# Allegro board 200-128343-0000_01.brd
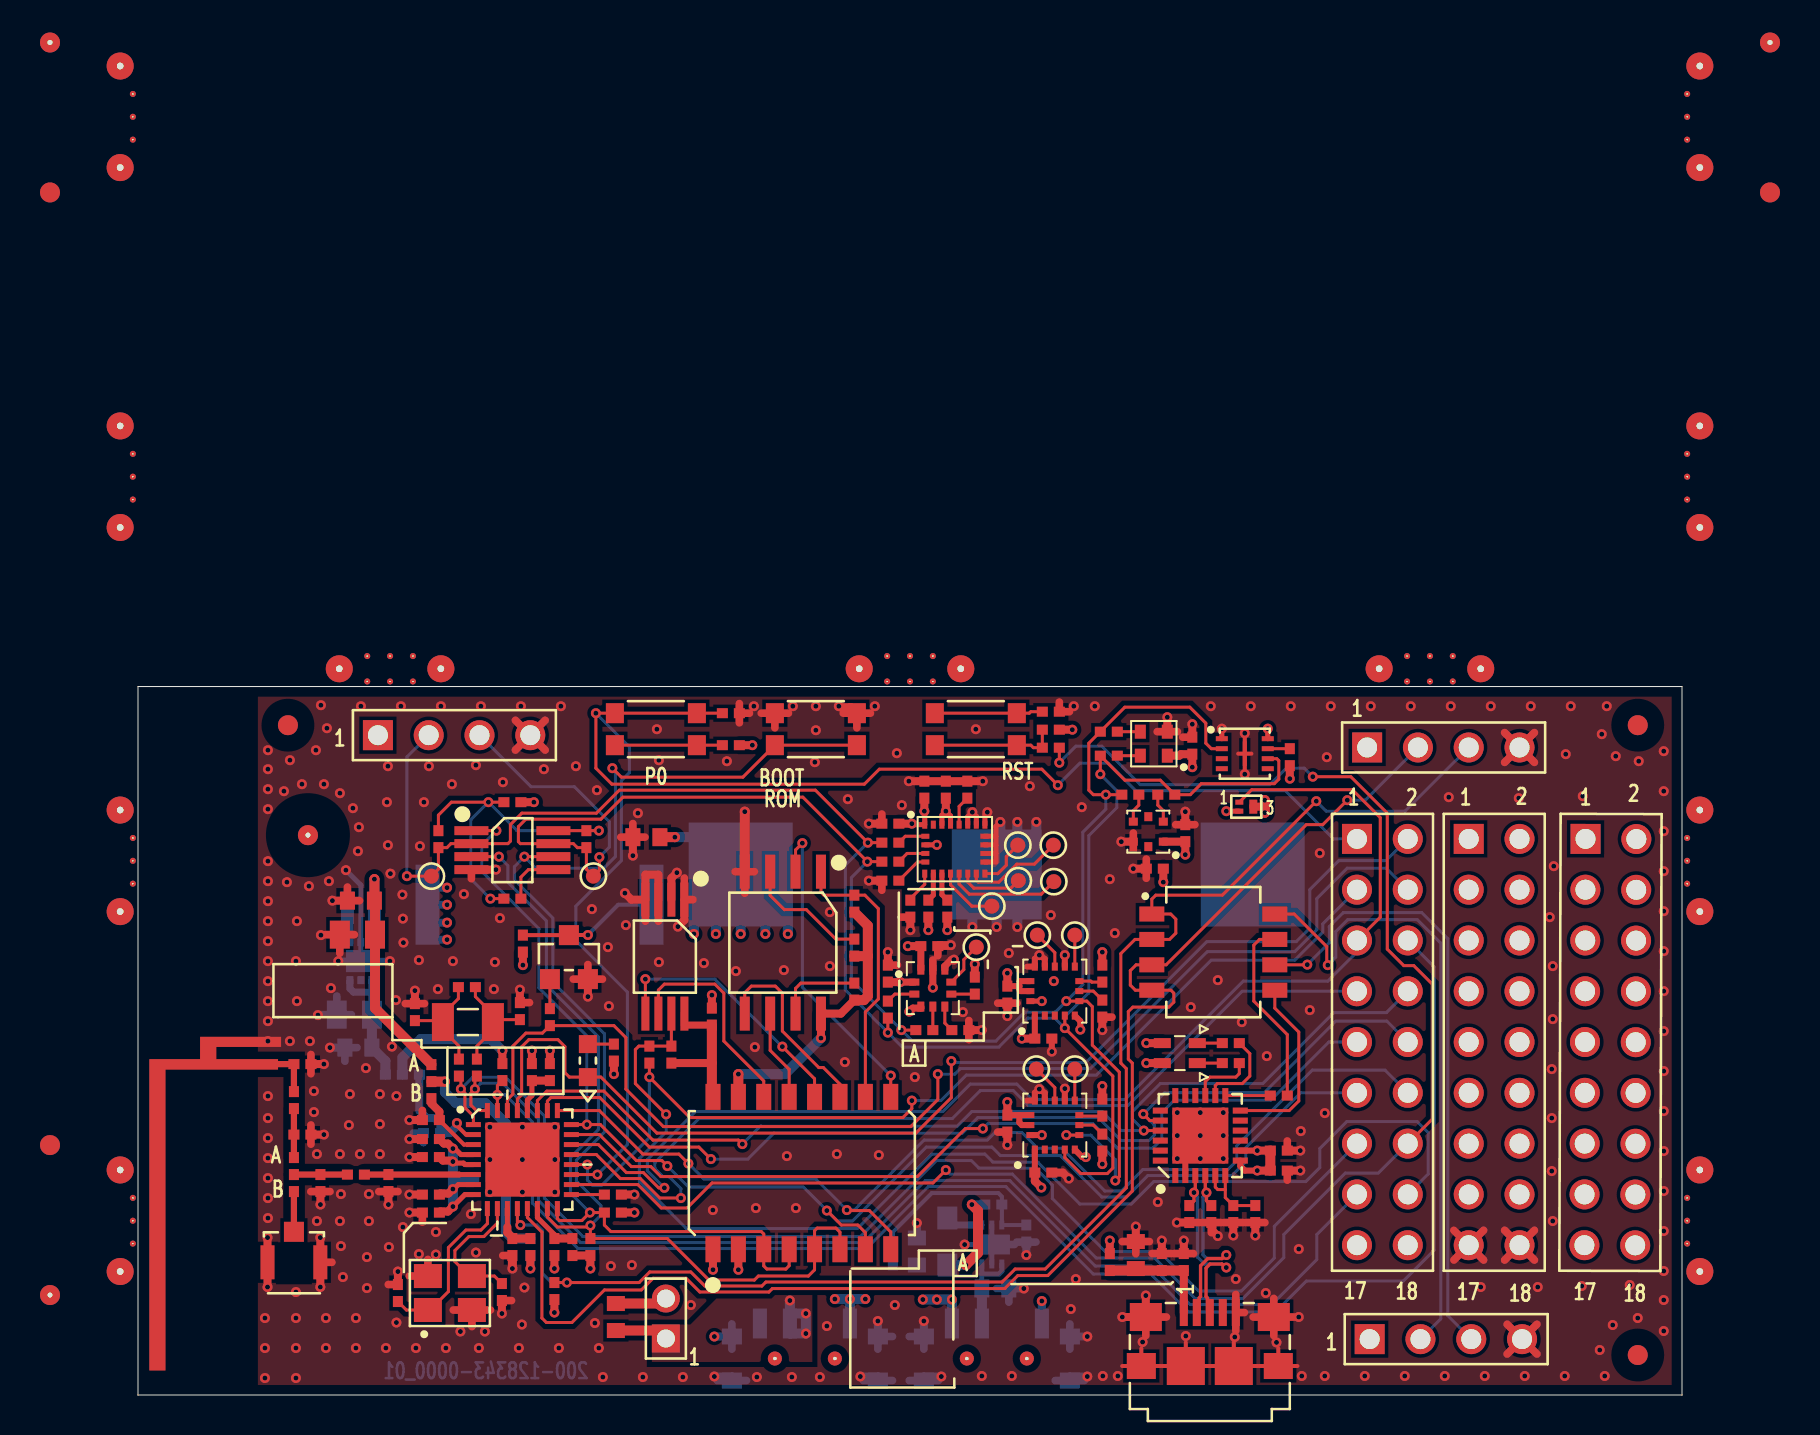
[diagram p0: board, top side]
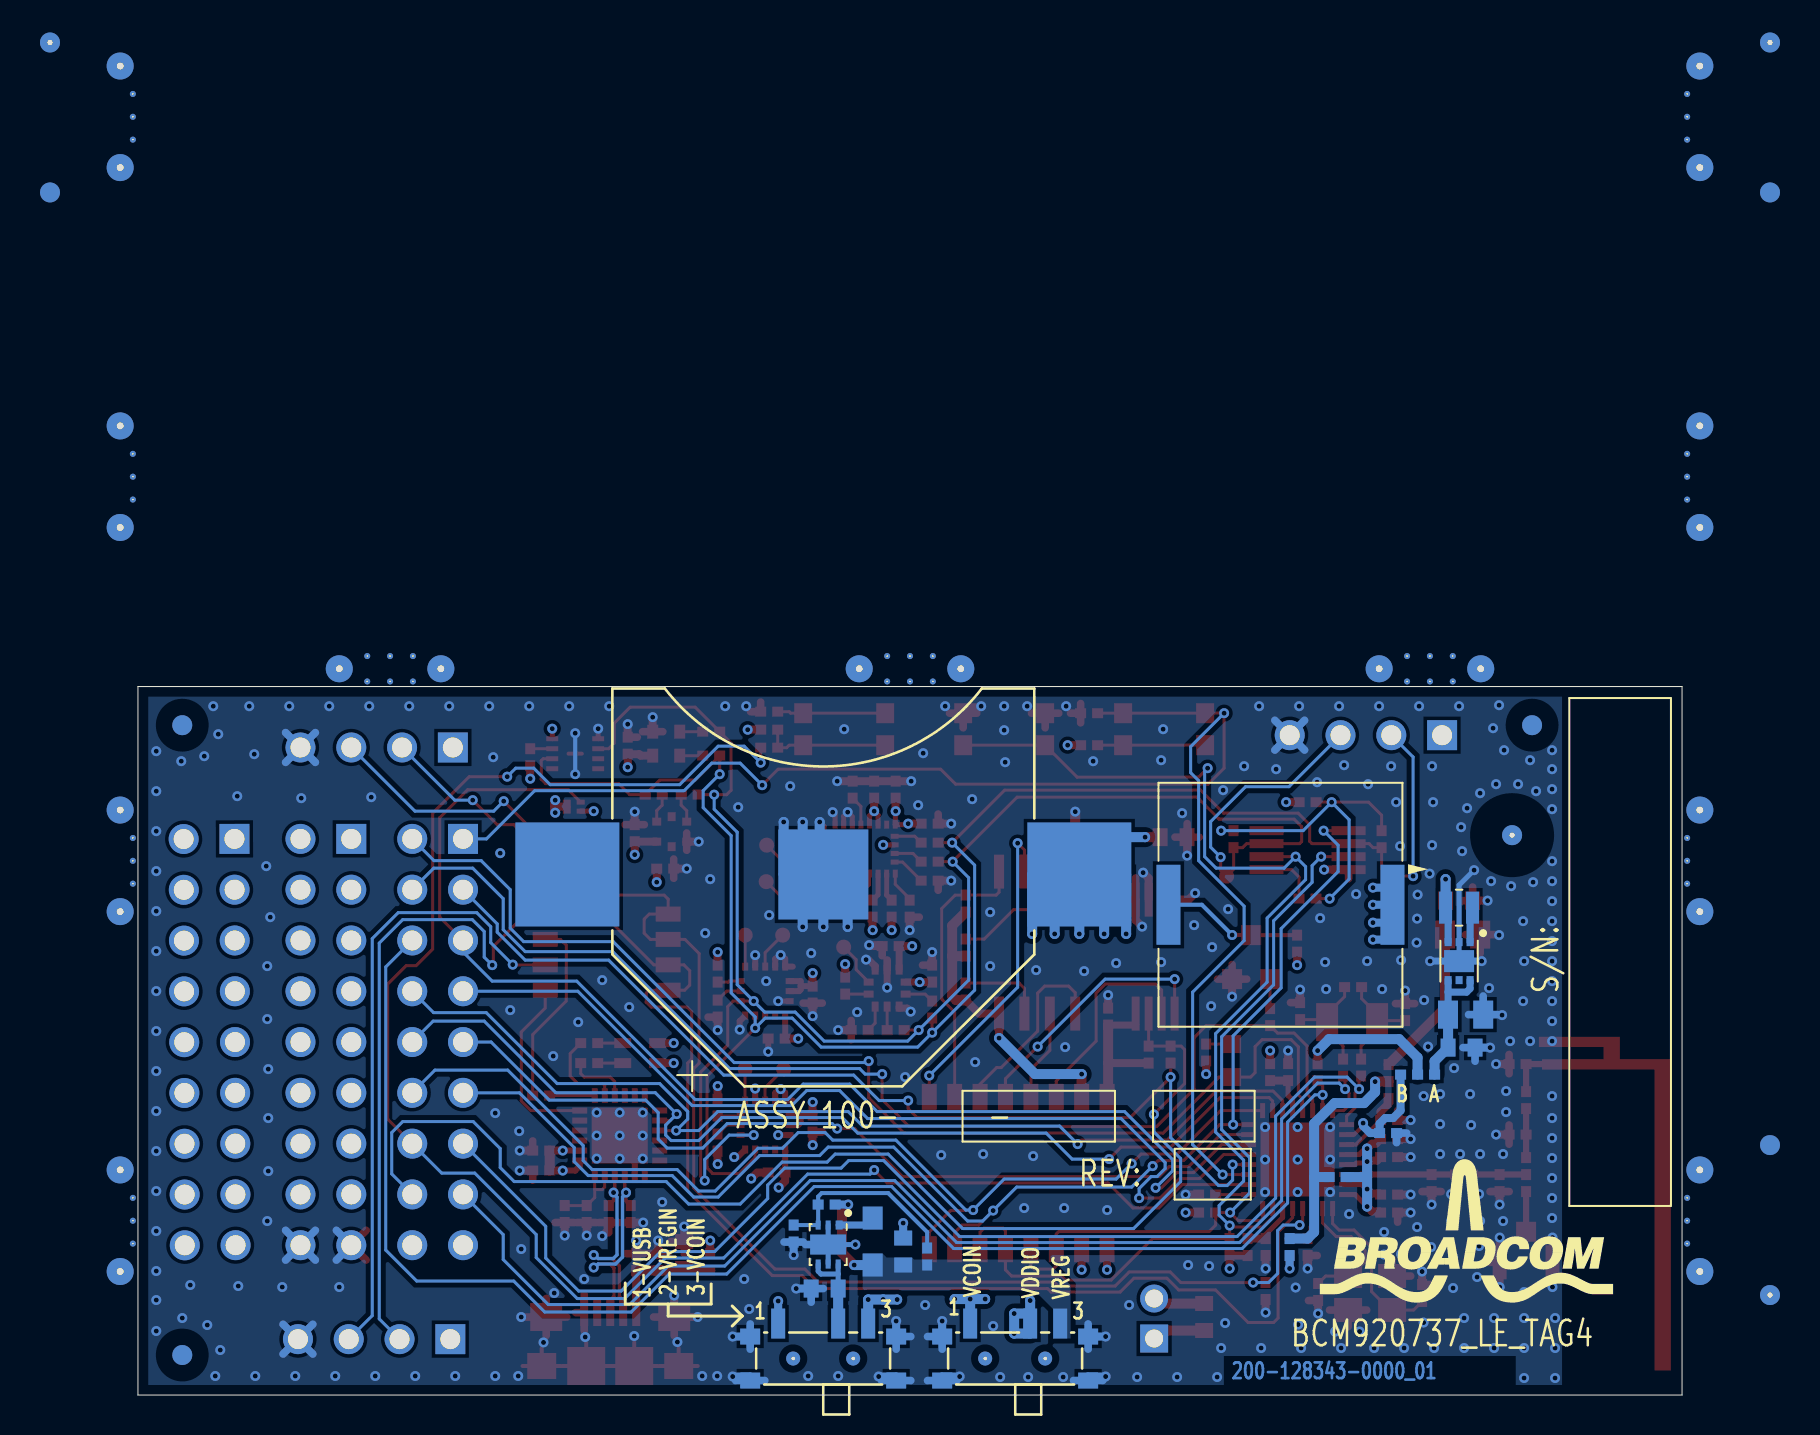
[diagram p1: board, bottom side, seen from below]

Outline 77.22 x 35.43 mm; copper layers: TOP, L02_GND, L03_PWR, BOTTOM. Coordinates in mm from the lower left corner of the outline.
Outline path: 0,35.43 0,0 77.22,0 77.22,35.43 0,35.43

## Design rules (mm)
net group DP_90_1: nets USB_DN USB_DP

## Placement (name value [footprint] x y rotation side)
A1  INV_F_ANTENNA  [TRACE]  99.88 -70.32 0 top
C1  4.7uF  [CAPC1608_IS0603Q]  25.43 27.9 180 top
C2  0.1uF  [CAPC1005_IS0402Q]  19.7 16.15 90 top
C3  0.1uF  [CAPC1005_IS0402Q]  20.82 7.4 270 top
C4  0.1uF  [CAPC1005_IS0402Q]  18.73 7.4 270 top
C5  0.1uF  [CAPC1005_IS0402Q]  28.7 18.93 90 top
C6  33uF  [CAPC2012_IS0805Q]  10.82 19.02 180 bottom
C7  33uF  [CAPC2012_IS0805Q]  10.97 23.02 180 top
C8  2.2uF  [CAPC1005_IS0402Q]  14.7 13.1 180 bottom
C9  1uF  [CAPC1005_IS0402Q]  14.65 13.75 180 top
C10  0.01uF  [CAPC1005_IS0402Q]  14.65 12.8 180 top
C11  10pF  [CAPC1005_IS0402Q]  14.65 11.9 180 top
C12  0.01uF  [CAPC1005_IS0402Q]  14.65 10.02 180 top
C13  0.01uF  [CAPC1005_IS0402Q]  14.65 9.12 180 top
C14  1.8pF  [CAPC1005_IS0402Q]  9.12 10.6 270 top
C15  1.8pF  [CAPC1005_IS0402Q]  12.53 10.6 270 top
C16  1.8pF (DNI)  [CAPC1005_IS0402Q]  8.22 16.55 0 top
C17  1.8pF (DNI)  [CAPC1005_IS0402Q]  8.22 13.03 0 top
C18  15pF  [CAPC1005_IS0402Q]  13 5.1 90 top
C19  15pF  [CAPC1005_IS0402Q]  18.2 5.15 270 top
C20  12pF  [CAPC1005_IS0402Q]  13.85 19.15 90 top
C21  12pF  [CAPC1005_IS0402Q]  19.1 19.2 90 top
C22  150pF  [CAPC1005_IS0402Q]  37.75 6.93 90 bottom
C23  4.7uF  [CAPC1608_IS0603Q]  42.88 5.32 0 bottom
C24  10uF  [CAPC1608_IS0603Q]  38.95 7.18 90 bottom
C25  10uF  [CAPC1005_IS0402Q]  55.88 9.05 90 top
C26  0.1uF  [CAPC1005_IS0402Q]  54.77 9.05 90 top
C28  4.7uF  [CAPC1608_IS0603Q]  49.9 7 90 top
C29  0.1uF  [CAPC1005_IS0402Q]  51.2 6.65 270 top
C30  10uF  [CAPC1608_IS0603Q]  11.03 17.38 180 bottom
C31  10uF  [CAPC1608_IS0603Q]  11.15 24.73 180 top
C32  0.01uF  [CAPC1005_IS0402Q]  41.48 30.27 270 top
C34  10uF  [CAPC1005_IS0402Q]  52.38 28.1 90 top
C35  4.7uF  [CAPC1005_IS0402Q]  39.58 22.45 0 top
C36  0.1uF  [CAPC1005_IS0402Q]  37.5 21.07 90 top
C37  0.1uF  [CAPC1005_IS0402Q]  50.85 26.32 180 top
C38  0.1uF  [CAPC1005_IS0402Q]  52.73 32.48 90 top
C43  0.1uF  [CAPC1005_IS0402Q]  45.27 11.12 180 top
C44  10uF  [CAPC1005_IS0402Q]  43.48 13.57 90 top
C48  0.1uF  [CAPC1005_IS0402Q]  43.48 20.02 90 top
C49  10uF  [CAPC1005_IS0402Q]  45.27 17.82 180 top
C54  0.1uF  [CAPC1005_IS0402Q]  57.05 12.22 180 top
C55  10uF  [CAPC1005_IS0402Q]  40.4 30.27 90 top
C56  0.1uF  [CAPC1005_IS0402Q]  39.33 30.27 90 top
C57  0.1uF  [CAPC1005_IS0402Q]  37.62 28.57 0 top
D1  LTST-C190CKT  [LEDC1608Q]  22.5 16.73 180 top
D3  APTB1615SURKCGKC-F01  [LEDS4_KING_APTB1615Q]  52.1 17.1 180 top
D4  10V  [FUSC1005_IS0402Q]  52.3 6.65 270 top
D5  10V  [FUSC1005_IS0402Q]  53.67 9.05 90 top
D6  10V  [FUSC1005_IS0402Q]  52.58 9.05 90 top
D7  10V  [FUSC1005_IS0402Q]  57.05 11.23 0 top
FB1  120Ohms  [INDC1005_IS0402Q]  19.62 7.4 90 bottom
FB2  120Ohms  [INDC1005_IS0402Q]  17.23 10.9 180 bottom
FB3  600Ohms  [INDC1005_IS0402Q]  48.6 6.65 270 top
J1  20279-001E-04  [IPX_20279-001E-01]  7.8 6.64 270 top
J2  PBC04SAAN  [CTST254PSS4]  61.59 2.79 0 top
J7  1981568-1  [TYCO_1981568-1]  53.6 1.45 0 top
J8  PBC04SAAN  [CTST254PSS4]  61.47 32.38 0 top
J9  PBC04SAAN  [CTST254PSS4]  12 33 0 top
J10  S-M-.100-2X9  [CTST254PDS18]  60.96 27.81 270 top
J11  S-M-.100-2X9 (DNI)  [CTST254PDS18]  66.55 27.81 270 top
J12  NRPN021PAEN-RC  [CTST200PSS2]  26.4 2.82 90 top
J13  S-M-.100-2X9 (DNI)  [CTST254PDS18]  72.39 27.81 269.8 top
L1  10uH  [INDS2_TDK_VLS201610CXQ]  11.15 24.38 0 bottom
L2  4.7uH  [INDS2_MUR_LQM21NQ]  40.48 7.68 180 bottom
LS1  PKLCS1212E4001-R1  [SPKRS2_MUR_PKLCS1212Q]  20.08 24.52 0 bottom
NOREF  -  [unnamed]  0 26.72 270 top
NOREF#2  -  [unnamed#2]  81.61 67.64 180 top
NOREF#3  -  [#3]  65.5 37 0 top
NOREF#4  -  [unnamed#4]  64.61 35.43 180 top
NOREF#5  -  [#3]  8.5 28 0 top
NOREF#6  -  [#3]  0 35.43 0 top
NOREF#7  -  [#3]  0 35.43 0 top
NOREF#8  -  [#3]  8.5 28 0 top
NOREF#9  -  [#3]  -4.4 5 90 top
NOREF#10  -  [unnamed#2]  8.5 28 0 top
NOREF#11  -  [#3]  0 0 0 top
NOREF#12  -  [#3]  -4.4 67.64 0 top
NOREF#13  -  [#3]  83.82 58.29 0 top
NOREF#14  -  [unnamed]  77.22 8.72 90 top
NOREF#15  -  [#3]  -335.28 -208.41 0 top
NOREF#16  -  [#3]  10.75 8 0 top
NOREF#17  -  [#3]  0 37.21 90 top
NOREF#18  -  [#3]  78.5 27 0 top
NOREF#19  -  [#3]  -4.4 67.64 90 top
NOREF#20  -  [#3]  77.22 35.43 0 top
NOREF#21  -  [unnamed]  0 8.72 270 top
NOREF#22  -  [unnamed#3]  -4.4 60.14 0 top
NOREF#23  -  [#3]  8.5 228 0 top
NOREF#24  -  [unnamed]  77.22 45.93 90 top
NOREF#25  -  [unnamed]  0 45.93 270 top
NOREF#26  -  [#3]  -22.5 -25.5 0 top
NOREF#27  -  [unnamed]  77.22 26.72 90 top
NOREF#28  -  [unnamed#3]  7.5 33.5 0 top
NOREF#29  -  [unnamed#3]  75 2 0 top
NOREF#30  -  [unnamed#2]  -4.4 67.64 0 top
NOREF#31  -  [#3]  -4.4 67.64 0 top
NOREF#32  -  [#3]  0 35.43 90 top
NOREF#33  -  [unnamed#2]  -4.4 5 0 top
NOREF#34  -  [#3]  101.6 96.39 0 top
NOREF#35  -  [#3]  -4.4 67.64 0 top
NOREF#36  -  [#3]  -191.5 228 0 top
NOREF#37  -  [unnamed#3]  -4.4 12.5 0 top
NOREF#38  -  [#3]  -9.4 0 90 top
NOREF#39  -  [unnamed#3]  75 33.5 0 top
NOREF#40  -  [#3]  -4.4 67.64 0 top
NOREF#41  -  [unnamed]  77.22 63.93 90 top
NOREF#42  -  [unnamed#4]  38.61 35.43 180 top
NOREF#43  -  [unnamed]  0 63.93 270 top
NOREF#44  -  [unnamed#3]  81.61 60.14 180 top
NOREF#45  -  [#3]  -9.4 72.64 0 top
NOREF#46  -  [unnamed#4]  12.61 35.43 180 top
NOREF#47  -  [#3]  363.22 -129.67 0 top
NOREF#48  -  [unnamed#3]  -4.4 12.5 180 bottom
NOREF#49  -  [unnamed#3]  75 2 180 bottom
NOREF#50  -  [unnamed#3]  7.5 33.5 180 bottom
NOREF#51  -  [#3]  363.22 -129.67 180 bottom
NOREF#52  -  [unnamed#3]  81.61 60.14 0 bottom
NOREF#53  -  [unnamed#3]  75 33.5 180 bottom
NOREF#54  -  [unnamed#3]  -4.4 60.14 180 bottom
Q1  2SC2712-Y,LF  [SOT23_B_E_C]  21.55 21.9 0 top
Q3  PMZB290UN  [SOT883_SC-101]  55.42 29.43 0 top
R1  10K  [RESC1005_IS0402Q]  45.65 33.27 180 top
R2  0  [RESC1005_IS0402Q]  45.65 32.38 0 top
R3  0  [RESC1005_IS0402Q]  20.6 16.15 270 top
R4  0  [RESC1005_IS0402Q]  21.73 7.4 90 top
R5  0  [RESC1005_IS0402Q]  19.62 7.4 90 top
R6  1K  [RESC1005_IS0402Q]  45.65 34.17 0 top
R7  1K  [RESC1005_IS0402Q]  29.65 32.5 180 top
R8  10K  [RESC1005_IS0402Q]  26.68 17.02 90 top
R9  0  [RESC1005_IS0402Q]  25.57 17.02 90 top
R10  100K  [RESC1005_IS0402Q]  29.65 34.1 0 top
R11  470  [RESC1005_IS0402Q]  19.25 22.57 90 top
R12  10K (DNI)  [RESC1005_IS0402Q]  20.82 5.2 270 top
R13  0  [RESC1005_IS0402Q]  18.23 16.15 270 top
R14  5.6K  [RESC1005_IS0402Q]  20.6 18.9 270 top
R15  10K  [RESC1005_IS0402Q]  35.83 20.18 90 top
R16  10K  [RESC1005_IS0402Q]  35.83 22.38 90 top
R17  10K  [RESC1005_IS0402Q]  35.83 24.57 90 top
R18  4.7K  [RESC1005_IS0402Q]  23.75 9.12 180 top
R19  4.7K  [RESC1005_IS0402Q]  22.62 7.4 90 top
R22  200  [RESC1005_IS0402Q]  23.8 17.12 90 top
R23  10K  [RESC1005_IS0402Q]  23.75 10.02 0 top
R24  2.7nH  [INDC1005_IS0402Q]  10.9 11.02 0 top
R25  0  [RESC1005_IS0402Q]  7.8 14.75 270 top
R26  0 (DNI)  [RESC1005_IS0402Q]  16.05 16.38 90 top
R27  0 (DNI)  [RESC1005_IS0402Q]  16.95 16.38 270 top
R28  10M  [RESC1005_IS0402Q]  16.45 20.4 0 top
R29  0  [RESC1608_IS0603Q]  23.9 3.9 90 top
R30  10K  [RESC1005_IS0402Q]  40.48 24.32 90 top
R31  10K  [RESC1005_IS0402Q]  39.52 24.32 90 top
R32  10K  [RESC1005_IS0402Q]  38.62 24.32 270 top
R33  10K  [RESC1005_IS0402Q]  37.62 25.73 180 top
R34  0  [RESC1005_IS0402Q]  37.62 26.68 180 top
R35  0  [RESC1005_IS0402Q]  37.62 27.62 180 top
R39  0  [RESC1005_IS0402Q]  18.73 29.65 180 top
R40  10K  [RESC1005_IS0402Q]  15.03 27.8 90 top
R41  10K  [RESC1005_IS0402Q]  22.43 27.8 90 top
R42  10K  [RESC1005_IS0402Q]  18.73 24.82 180 top
R43  10K  [RESC1005_IS0402Q]  41.85 20.48 270 top
R44  0  [RESC1005_IS0402Q]  37.5 19.27 90 top
R45  0  [RESC1005_IS0402Q]  39.33 18.25 0 top
R46  10K  [RESC1005_IS0402Q]  41.12 18.25 180 top
R47  0  [RESC1005_IS0402Q]  48.55 31.98 180 top
R48  0  [RESC1005_IS0402Q]  48.55 33.17 180 top
R50  0  [RESC1005_IS0402Q]  51.42 30.02 180 top
R51  0  [RESC1005_IS0402Q]  49.62 30.02 0 top
R52  100K  [RESC1005_IS0402Q]  57.6 31.9 90 top
R53  10K  [RESC1005_IS0402Q]  48.23 12.62 270 top
R54  10K  [RESC1005_IS0402Q]  48.23 14.38 90 top
R57  10K  [RESC1005_IS0402Q]  48.23 19.32 270 top
R58  10K  [RESC1005_IS0402Q]  48.23 21.07 90 top
R59  0  [RESC1005_IS0402Q]  57.05 14.97 0 top
R60  200  [RESC1005_IS0402Q]  54.65 17.6 180 top
R61  200  [RESC1005_IS0402Q]  54.65 16.6 180 top
RD5  0  [RESC1005_IS0402Q_OPT_AB]  14.68 15.68 270 top
RD6  0  [RESC1005_IS0402Q_OPT_AB]  13.22 16.02 0 bottom
RD7  0  [RESC1005_IS0402Q_OPT_AB]  7.8 11.02 270 top
RFB1  300K  [RESC1005_IS0402Q]  42.77 9.52 0 bottom
RFB2  240K  [RESC1005_IS0402Q]  44.42 8.07 270 bottom
SW1  KMR221GLFS  [SWPBS4_CK_KMR2XXG]  33.9 33.3 0 top
SW2  KMR221GLFS  [SWPBS4_CK_KMR2XXG]  25.9 33.3 0 top
SW3  KMR221GLFS  [SWPBS4_CK_KMR2XXG]  41.9 33.3 0 top
SW4  SSSS811101  [SWSLS3_ALPS_SSSS811101]  42.95 1.82 90 bottom
SW5  SSSS811101  [SWSLS3_ALPS_SSSS811101]  33.35 1.82 90 bottom
SW6  A6H-4101  [SWDPS8_OMRON_A6H-4102]  53.77 22.15 0 top
SW8  TDA08H0SB1  [SWDPS16_ITT_TDA08H0SK1]  33.2 11.1 90 top
TP5  TP-SMT-030-RND  [TP_SMD_030RD]  14.68 25.95 180 top
TP6  TP-SMT-030-RND  [TP_SMD_030RD]  22.77 25.95 180 top
TP8  TP-SMT-030-RND  [TP_SMD_030RD]  42.7 24.45 0 top
TP9  TP-SMT-030-RND  [TP_SMD_030RD]  44 27.5 0 top
TP10  TP-SMT-030-RND  [TP_SMD_030RD]  41.92 22.4 0 top
TP14  TP-SMT-030-RND  [TP_SMD_030RD]  44.92 16.3 90 top
TP15  TP-SMT-030-RND  [TP_SMD_030RD]  46.85 16.3 90 top
TP18  TP-SMT-030-RND  [TP_SMD_030RD]  44.98 23 90 top
TP19  TP-SMT-030-RND  [TP_SMD_030RD]  46.85 23 90 top
TP20  TP-SMT-030-RND  [TP_SMD_030RD]  44.02 25.73 0 top
TP21  TP-SMT-030-RND  [TP_SMD_030RD]  45.77 27.5 0 top
TP22  TP-SMT-030-RND  [TP_SMD_030RD]  45.8 25.68 0 top
U1  24FC512-I/ST  [TSOP65P640_8_D300N]  26.35 21.93 270 top
U2  BCM20737A1KML2G  [QFN50P500X500_32_HS370_BCM]  19.23 11.77 0 top
U3  MX25L8006EM2I-12G  [SOIC127P780_8_D530N]  32.25 22.62 270 top
U4  XC9265B1214R-G  [SON55P200X180_6_USP-6ELQ]  11.15 21.7 270 bottom
U5  XC9236_ADJ  [SON50P200X180_6_USP-6CQ]  42.7 7.52 270 bottom
U6  CP2105-F01-GM  [QFN50P400X400_24_HS280N]  53.12 12.97 90 top
U7  LSM9DS1  [LGA43P350X300_24_ST-LGA24N]  40.85 27.3 0 top
U8  HTS221  [MODS6_ST_HLGA-6LN]  50.52 28.18 180 top
U9  LTC4313IMS8-1_PBF  [TSOP65P490_8_D300N]  18.73 27.25 0 top
U10  UVIS25  [QFN60P250X250_10_ST-LGA-10LN]  39.75 20.35 0 top
U11  LIS3DSH  [LGA50P300X300_16_ST-LGA16N]  45.85 13.5 90 top
U12  LPS331APTR  [LGA50P300X300_16_ST-LGA16N]  45.85 20.2 90 top
U13  BH1780GLI-E2  [SNSRS4_ROHM_WLGA041W02Q]  50.8 32.58 180 top
U14  DEEP_CHIP (DNI)  [SON50P250X250_8_HS120X020_PRELIM]  55.35 32.08 0 top
Y1  24.000MHz  [XTALS4_3M2X2M5]  15.6 5.1 90 top
Y2  0.03277MHz  [XTALS2_ABR_ABS07Q]  16.5 18.65 0 top
ZB1  3002TR  [BATHS3_KEY_3002Q]  42.94 26.04 180 bottom

## Library data of the parts
A1 = INV_F_ANTENNA_1: Tolerance: TOLERANCE; User Part Number: PART NUMBER
C1-C26 C28-C32 C34-C38 C43 C44 C48 C49 C54-C57 = CAP: User Part Number: Part No
D1 = DIO-LED: User Part Number: Part No
D3 = LED-DUAL-RED1-GRN2: User Part Number: Part No
D4-D7 = DIO-TVS-BIPOLAR-2: User Part Number: Part No
FB1-FB3 = FB: User Part Number: Part No
J1 = RF-2GND-J: User Part Number: Part No
J2 J8 J9 = PLG-4-J: User Part Number: Part No
J7 = USB-5P-6SH-J: User Part Number: Part No
J10 J11 J13 = PLG-18-ODD-EVEN-J: Tolerance: TOLERANCE; User Part Number: PART NUMBER
J12 = HDR1X2-J: User Part Number: Part No
L1 = IND-SHIELDED-NO-DOT: User Part Number: Part No
L2 = IND: User Part Number: Part No
LS1 = SPEAKER: User Part Number: Part No
NOREF NOREF#14 NOREF#21 NOREF#24 NOREF#25 NOREF#27 NOREF#41 NOREF#43 = -: User Part Number: MOUSEBITE_BD2RAIL_70MIL-3HOLE
NOREF#2 NOREF#10 NOREF#30 NOREF#33 = -: User Part Number: MTGHOLE_D320N
NOREF#4 NOREF#42 NOREF#46 = -: User Part Number: MOUSEBITE_BD2BD_70MIL-3HOLE
Q1 = NPN: User Part Number: Part No
Q3 = FET-MOS-N-GSD: User Part Number: Part No
R1-R19 R22 R23 R25-R35 R39-R48 R50-R54 R57-R61 RFB1 RFB2 = RES: User Part Number: Part No
R24 = IND-DOT-1: User Part Number: Part No
RD5 RD6 = RES-OPT-B-A: User Part Number: Part No
RD7 = RES-OPT-A-B: User Part Number: Part No
SW1-SW3 = SWITCH-PB-13-24: User Part Number: Part No
SW4 SW5 = SWITCH-SPDT-CP2NC3NO1-4SHLD: User Part Number: Part No
SW6 = SW-DIP-4: User Part Number: Part No
SW8 = SW-DIP-8: User Part Number: Part No
TP5 TP6 TP8-TP10 TP14 TP15 TP18-TP22 = TP: User Part Number: Part No
U1 = 24XX512-DIL8: Tolerance: TOLERANCE; User Part Number: PART NUMBER
U2 = BCM20736A1KML2G-W1000-27301: User Part Number: Part No
U3 = MX25LXXX-DIL8: User Part Number: Part No
U4 = XC9265-DFN6H: User Part Number: Part No
U5 = XC9236-ADJ-DFN6H: User Part Number: Part No
U6 = USB-CP2105-QFN24H: User Part Number: Part No
U7 = LSM9DS1-LGA24: User Part Number: Part No
U8 = HTS221-LGA6: User Part Number: Part No
U9 = LTC4313-DIL8: User Part Number: Part No
U10 = UVIS25-QFN10: User Part Number: Part No
U11 = LIS3DSH-LGA16: User Part Number: Part No
U12 = LPS331AP-LGA16: User Part Number: Part No
U13 = BH1780-DFN4: User Part Number: Part No
U14 = LTC4313-DIL8_0: User Part Number: Part No
Y1 = XTAL-1G3G: User Part Number: Part No
Y2 = XTAL: User Part Number: Part No
ZB1 = BATTERY-HOLDER-P2N1: User Part Number: Part No

## Footprints (pads in the part's own frame, mm; a bottom-side part is the same pattern mirrored in y, then rotated)
BATHS3_KEY_3002Q
  rect 4.5x4.5 smd: N(0,0)
  rect 5.2x5.2 smd: P1(-12.8,0) P2(12.8,0)
CAPC1005_IS0402Q
  rect 0.55x0.5 smd: 1(-0.425,0) 2(0.425,0)
CAPC1608_IS0603Q
  rect 0.75x0.9 smd: 1(-0.675,0) 2(0.675,0)
CAPC2012_IS0805Q
  rect 1x1.4 smd: 1(-0.88,0) 2(0.88,0)
CTST200PSS2
  rect 1.4x1.4 hole 0.9: 1(0,0)
  round 1.4 hole 0.9: 2(2,0)
CTST254PDS18
  rect 1.5x1.5 hole 1: 1(0,0)
  round 1.5 hole 1: 2(0,2.54) 3(2.54,0) 4(2.54,2.54) 5(5.08,0) 6(5.08,2.54) 7(7.62,0) 8(7.62,2.54) 9(10.16,0) 10(10.16,2.54) 11(12.7,0) 12(12.7,2.54) 13(15.24,0) 14(15.24,2.54) 15(17.78,0) 16(17.78,2.54) 17(20.32,0) 18(20.32,2.54)
CTST254PSS4
  rect 1.5x1.5 hole 1: 1(0,0)
  round 1.5 hole 1: 2(2.54,0) 3(5.08,0) 4(7.62,0)
FUSC1005_IS0402Q
  rect 0.55x0.5 smd: 1(-0.425,0) 2(0.425,0)
INDC1005_IS0402Q
  rect 0.55x0.5 smd: 1(-0.425,0) 2(0.425,0)
INDS2_MUR_LQM21NQ
  rect 1x1.15 smd: 1(0,1.175) 2(0,-1.175)
INDS2_TDK_VLS201610CXQ
  rect 0.65x1.6 smd: 1(-0.675,0) 2(0.675,0)
IPX_20279-001E-01
  rect 1.7x0.7 smd: G1(0,1.32) G2(0,-1.32)
  rect 1x1 smd: S(-1.525,0)
LEDC1608Q
  rect 0.9x0.9 smd: A(0,-0.826) C(0,0.826)
LEDS4_KING_APTB1615Q
  rect 0.85x0.5 smd: A1(0.875,0.5) A2(0.875,-0.5) C1(-0.875,0.5) C2(-0.875,-0.5)
LGA43P350X300_24_ST-LGA24N
  rect 0.25x0.4 smd: 1(-1.505,1.225) 6(-1.505,-1.225) 7(-1.075,-1.225) 8(-0.645,-1.225) 9(-0.215,-1.225) 10(0.215,-1.225) 11(0.645,-1.225) 12(1.075,-1.225) 13(1.505,-1.225) 18(1.505,1.225) 19(1.075,1.225) 20(0.645,1.225) 21(0.215,1.225) 22(-0.215,1.225) 23(-0.645,1.225) 24(-1.075,1.225)
  rect 0.4x0.25 smd: 2(-1.475,0.645) 3(-1.475,0.215) 4(-1.475,-0.215) 5(-1.475,-0.645) 14(1.475,-0.645) 15(1.475,-0.215) 16(1.475,0.215) 17(1.475,0.645)
LGA50P300X300_16_ST-LGA16N
  rect 0.4x0.3 smd: 1(-1.225,1) 2(-1.225,0.5) 3(-1.225,0) 4(-1.225,-0.5) 5(-1.225,-1) 9(1.225,-1) 10(1.225,-0.5) 11(1.225,0) 12(1.225,0.5) 13(1.225,1)
  rect 0.3x0.4 smd: 6(-0.5,-1.225) 7(0,-1.225) 8(0.5,-1.225) 14(0.5,1.225) 15(0,1.225) 16(-0.5,1.225)
MODS6_ST_HLGA-6LN
  rect 0.45x0.4 smd: 1(-0.75,0.5) 2(-0.75,-0.5) 4(0.75,-0.5) 5(0.75,0.5)
  rect 0.4x0.45 smd: 3(0,-0.75) 6(0,0.75)
QFN50P400X400_24_HS280N
  rect 0.75x0.3 smd: 1(-2,1.25) 2(-2,0.75) 3(-2,0.25) 4(-2,-0.25) 5(-2,-0.75) 6(-2,-1.25) 13(2,-1.25) 14(2,-0.75) 15(2,-0.25) 16(2,0.25) 17(2,0.75) 18(2,1.25)
  rect 0.3x0.75 smd: 7(-1.25,-2) 8(-0.75,-2) 9(-0.25,-2) 10(0.25,-2) 11(0.75,-2) 12(1.25,-2) 19(1.25,2) 20(0.75,2) 21(0.25,2) 22(-0.25,2) 23(-0.75,2) 24(-1.25,2)
  rect 2.8x2.8 smd: H(0,0)
QFN50P500X500_32_HS370_BCM
  rect 0.75x0.25 smd: 1(-2.45,1.75) 2(-2.45,1.25) 3(-2.45,0.75) 4(-2.45,0.25) 5(-2.45,-0.25) 6(-2.45,-0.75) 7(-2.45,-1.25) 8(-2.45,-1.75) 17(2.45,-1.75) 18(2.45,-1.25) 19(2.45,-0.75) 20(2.45,-0.25) 21(2.45,0.25) 22(2.45,0.75) 23(2.45,1.25) 24(2.45,1.75)
  rect 0.25x0.75 smd: 9(-1.75,-2.45) 10(-1.25,-2.45) 11(-0.75,-2.45) 12(-0.25,-2.45) 13(0.25,-2.45) 14(0.75,-2.45) 15(1.25,-2.45) 16(1.75,-2.45) 25(1.75,2.45) 26(1.25,2.45) 27(0.75,2.45) 28(0.25,2.45) 29(-0.25,2.45) 30(-0.75,2.45) 31(-1.25,2.45) 32(-1.75,2.45)
  rect 3.7x3.7 smd: H(0,0)
QFN60P250X250_10_ST-LGA-10LN
  rect 0.5x0.35 smd: 1(-0.925,0.3) 2(-0.925,-0.3) 6(0.925,-0.3) 7(0.925,0.3)
  rect 0.35x0.5 smd: 3(-0.6,-0.925) 4(0,-0.925) 5(0.6,-0.925) 8(0.6,0.925) 9(0,0.925) 10(-0.6,0.925)
RESC1005_IS0402Q
  rect 0.55x0.5 smd: 1(-0.425,0) 2(0.425,0)
RESC1005_IS0402Q_OPT_AB
  rect 0.55x0.5 smd: A(-0.85,0) B(0.85,0) C(0,0)
RESC1608_IS0603Q
  rect 0.75x0.9 smd: 1(-0.675,0) 2(0.675,0)
SNSRS4_ROHM_WLGA041W02Q
  rect 0.55x0.7 smd: 1(-0.675,0.6) 2(-0.675,-0.6) 3(0.675,-0.6) 4(0.675,0.6)
SOIC127P780_8_D530N
  rect 1.7x0.5 smd: 1(-3.55,1.905) 2(-3.55,0.635) 3(-3.55,-0.635) 4(-3.55,-1.905) 5(3.55,-1.905) 6(3.55,-0.635) 7(3.55,0.635) 8(3.55,1.905)
SON50P200X180_6_USP-6CQ
  rect 0.45x0.35 smd: 1(-0.975,0.55)
  rect 0.45x0.25 smd: 2(-0.975,0) 3(-0.975,-0.5) 4(0.975,-0.5) 5(0.975,0) 6(0.975,0.5)
  rect 1x1.8 smd: H(0,0)
SON50P250X250_8_HS120X020_PRELIM
  rect 0.6x0.25 smd: 1(-1.148,0.75) 2(-1.148,0.25) 3(-1.148,-0.25) 4(-1.148,-0.75) 5(1.148,-0.75) 6(1.148,-0.25) 7(1.148,0.25) 8(1.148,0.75)
  rect 0.2x1.2 smd: H(0,0)
SON55P200X180_6_USP-6ELQ
  rect 0.4x0.35 smd: 1(-0.95,0.55) 2(-0.95,0) 3(-0.95,-0.55) 4(0.95,-0.55) 5(0.95,0) 6(0.95,0.55)
  rect 1.1x1.5 smd: H(0,0)
SOT23_B_E_C
  rect 1x1 smd: B(-0.95,-1.1) C(0,1.1) E(0.95,-1.1)
SOT883_SC-101
  rect 0.4x0.25 smd: 1(-0.35,0.225) 2(-0.35,-0.225)
  rect 0.4x0.7 smd: 3(0.35,0)
SPKRS2_MUR_PKLCS1212Q
  rect 1.2x4 smd: 1(-5.6,0) 2(5.6,0)
SWDPS8_OMRON_A6H-4102
  rect 1.25x0.75 smd: 1(-3.075,1.905) 2(-3.075,0.635) 3(-3.075,-0.635) 4(-3.075,-1.905) 5(3.075,-1.905) 6(3.075,-0.635) 7(3.075,0.635) 8(3.075,1.905)
SWDPS16_ITT_TDA08H0SK1
  rect 1.3x0.75 smd: 1(-3.81,4.445) 2(-3.81,3.175) 3(-3.81,1.905) 4(-3.81,0.635) 5(-3.81,-0.635) 6(-3.81,-1.905) 7(-3.81,-3.175) 8(-3.81,-4.445) 9(3.81,-4.445) 10(3.81,-3.175) 11(3.81,-1.905) 12(3.81,-0.635) 13(3.81,0.635) 14(3.81,1.905) 15(3.81,3.175) 16(3.81,4.445)
SWPBS4_CK_KMR2XXG
  rect 0.9x1 smd: 1(2.05,0.8) 2(2.05,-0.8) 3(-2.05,0.8) 4(-2.05,-0.8)
SWSLS3_ALPS_SSSS811101
  custom 0.7x0.175 hole 0.9 unplated: (0,-1.5) (0,1.5)
  rect 1.5x0.7 smd: 1(1.75,2.25) 2(1.75,-0.75) 3(1.75,-2.25)
  rect 0.8x1 smd: SH1(1.1,3.65) SH2(1.1,-3.65) SH3(-1.1,3.65) SH4(-1.1,-3.65)
TP_SMD_030RD
  round 0.75 smd: 1(0,0)
TRACE
  round 0.25 smd: 1(-93.091,86.868) 2(-92.091,86.868)
TSOP65P490_8_D300N
  rect 1.7x0.45 smd: 1(-2.05,0.975) 2(-2.05,0.325) 3(-2.05,-0.325) 4(-2.05,-0.975) 5(2.05,-0.975) 6(2.05,-0.325) 7(2.05,0.325) 8(2.05,0.975)
TSOP65P640_8_D300N
  rect 1.7x0.4 smd: 1(-2.85,0.975) 2(-2.85,0.325) 3(-2.85,-0.325) 4(-2.85,-0.975) 5(2.85,-0.975) 6(2.85,-0.325) 7(2.85,0.325) 8(2.85,0.975)
TYCO_1981568-1
  rect 0.4x1.35 smd: 1(-1.3,2.675) 2(-0.65,2.675) 3(0,2.675) 4(0.65,2.675) 5(1.3,2.675)
  rect 1.6x1.4 smd: SH1(-3.2,2.45) SH2(3.2,2.45)
  rect 1.45x1.3 smd: SH3(-3.425,0) SH4(3.425,0)
  rect 1.9x1.9 smd: SH5(-1.2,0) SH6(1.2,0)
unnamed
  custom 1.35x0.337 hole 1.8 unplated: (-2.54,-0.889) (2.54,-0.889)
  custom 0.3x0.075 hole 0.5 unplated: (-1.143,-0.254) (0,-0.254) (1.143,-0.254)
unnamed#2
  custom 1x0.25 hole 3.2 unplated: (0,0)
unnamed#3
  round 1 smd: (0,0)
unnamed#4
  custom 1.35x0.337 hole 1.8 unplated: (-2.54,-0.889) (2.54,-0.889)
  custom 0.3x0.075 hole 0.5 unplated: (-1.143,-0.254) (-1.143,-1.524) (0,-0.254) (0,-1.524) (1.143,-0.254) (1.143,-1.524)
XTALS2_ABR_ABS07Q
  rect 1.1x1.9 smd: 1(-1.25,0) 2(1.25,0)
XTALS4_3M2X2M5
  rect 1.2x1.4 smd: 1(-0.85,1.1) 2(-0.85,-1.1) 3(0.85,-1.1) 4(0.85,1.1)

## Nets
5V_USB: C54.2 D7.1 FB3.1 SW4.1(NO) U6.7(REGIN) U6.8(VBUS)
GND: A1.1(FEED) A1.2(GND) C1.2 C2.2 C3.2 C4.2 C5.2 C6.2 C7.2 C8.2 C9.2 C10.2 C11.2 C12.2 C13.2 C14.2 C15.2 C16.1 C16.2 C17.2 C18.2 C19.2 C20.2 C21.2 C23.2 C24.2 C25.1 C26.1 C28.2 C29.1 C30.2 C31.2 C32.1 C34.2 C35.2 C36.2 C37.2 C38.2 C43.1 C44.1 C48.1 C49.1 C54.1 C55.2 C56.2 C57.1 D4.1 D5.1 D6.1 D7.2 J1.G1(GND#G1) J1.G2(GND#G2) J2.4(N4) J7.5(GND) J7.SH1(SHIELD#SH1) J7.SH2(SHIELD#SH2) J7.SH3(SHIELD#SH3) J7.SH4(SHIELD#SH4) J7.SH5(SHIELD#SH5) J7.SH6(SHIELD#SH6) J8.4(N4) J9.4(N4) J11.17 J11.18 Q1.E R6.2 R10.2 R12.2 R23.2 R25.1 R32.2 R33.2 R46.1 R53.2 R57.2 RFB2.2 SW1.1 SW1.3 SW4.SH1(MTG1) SW4.SH2(MTG2) SW4.SH3(MTG3) SW4.SH4(MTG4) SW5.SH1(MTG1) SW5.SH2(MTG2) SW5.SH3(MTG3) SW5.SH4(MTG4) U1.1(A0) U1.2(A1) U1.3(A2) U1.4(GND) U2.H(VSS) U3.4(GND) U4.2(GND) U4.H(HS-GND) U5.2(VSS#2) U5.5(VSS#5) U5.H(HS-VSS) U6.2(GND) U6.H(HS-GND) U7.14(RSVD1_GND) U7.15(RSVD2_GND) U7.16(RSVD3_GND) U7.17(RSVD4_GND) U7.18(RSVD5_GND) U7.19(GND1) U7.20(GND2) U8.5(GND) U9.4(GND) U10.3(RSVD_GND) U10.8(GND1) U10.9(GND2) U11.5(GND1) U11.10(RSVD_GND) U11.12(GND2) U11.13(GND3) U11.16(GND4) U12.5(GND1) U12.10(RSVD_GND) U12.12(GND2) U12.13(GND3) U12.16(GND4) U13.2(GND) U14.1(GND_1) U14.H(GND_H) Y1.2(GND#2) Y1.4(GND#4) ZB1.N
VDD_SENS: C34.1 C35.1 C36.1 C37.1 C38.1 C43.2 C44.2 C48.2 C49.2 C55.1 C56.1 C57.2 Q3.2(S) R30.1 R31.1 R43.1 R54.2 R58.2 U7.1(VDD_IO1) U7.3(VDD_IO2) U7.22(VDD1) U7.23(VDD2) U8.1(VDD) U10.1(VDD_IO) U10.10(VDD) U11.1(VDD_IO) U11.14(VDD) U11.15(RSVD_VDD) U12.1(VDD_IO) U12.14(VDD) U12.15(VCCA) U13.1(VCC)
VDDIO: D3.A1(RED_ANODE) D3.A2(GREEN_ANODE) J2.1(N1) J8.1(N1) J9.1(N1) J11.1 J11.2 J12.2 LS1.1 Q3.3(D) R1.1 R3.1 R4.1 R7.1 R11.1 R13.1 R18.1 R19.1 R22.1 R29.2 R39.1 R52.1 RD6.C SW8.1(A1) SW8.2(A2) U14.8(VCC)
VDDIO_EE: C5.1 R8.1 SW8.16(B1) U1.8(VCC)
VDDIO_SF: R15.1 R16.1 R17.1 SW8.15(B2) U3.8(VCC)
1P2VC: FB1.1 R5.1
1P2VRF: C10.1 C11.1 C12.1 C13.1 FB2.2 U2.4(VDDIF) U2.5(VDDFE) U2.7(VDDVCO) U2.8(VDDPLL)
BCM_RX: J8.3(N3) R12.1 SW6.1(A1) SW6.2(A2) U2.12(UART_RXD)
BCM_TX: J8.2(N2) SW6.3(A3) SW6.4(A4) U2.13(UART_TXD)
CE: R17.2 SW8.10(B7) U3.1(CS_L)
EXT_LDO_IN: C6.1 C30.1 RD6.A U4.4(CE) U4.6(VIN)
LDOEXT: C7.1 C31.1 L1.2 RD5.A U4.3(VOUT)
LDOINT: C9.1 RD5.B U2.3(LDOOUT)
MISO: SW8.9(B8) U3.2(SO)
P0: J10.1 R10.1 SW2.1 SW2.3 U2.19(P0)
P1: J10.3 R9.1 U2.20(P1)
P2: J10.5 Q3.1(G) U2.22(P2)
P3: J10.7 U2.21(P3)
P4: J10.9 U2.23(P4)
P8/P33: J10.11 SW8.7(A7) U2.24(P8/P33) U9.1(EN)
P11/P27: J10.13 R26.1 U2.1(XTALI32K/P11/P27)
P12/P26: J10.15 R27.2 U2.32(XTALO32K/P12/P26)
P13/P28: D1.C(CATHODE) J10.2 U2.29(P13/P28)
P14/P38: J10.4 R14.2 U2.30(P14/P38)
P15: J10.6 R13.2 U2.31(P15)
P24: J10.8 U2.27(P24) U6.21(TXD_SCI)
P25: J10.10 U2.26(P25) U6.20(RXD_SCI)
P32: J10.12 SW8.8(A8) U2.25(P32)
REG_IN: C23.1 SW4.2(COM) U5.4(CE/MODE) U5.6(VIN)
RESET_N: J10.14 R2.2 U2.18(RESET_L)
SCK: SW8.13(B4) U3.6(SCK)
SCL: J9.2(N2) R35.2 R40.1 R44.1 R47.2 R50.1 TP5.1(TP) U9.2(SCLOUT) U11.4(SCL/SPC) U12.4(SCL/SPC) U14.6(SCL)
SCL_EE: SW8.14(B3) U1.6(SCL)
SCL_SCK: R18.2 SW8.3(A3) SW8.4(A4) U2.16(SCL) U9.3(SCLIN)
SDA: J9.3(N3) R34.2 R41.1 R45.1 R48.2 R51.1 TP6.1(TP) U9.7(SDAOUT) U11.6(SDA/SDI/SDO) U12.6(SDA/SDI/SDO) U14.2(SDA)
SDA_EE: SW8.12(B5) U1.5(SDA)
SDA_SI: R19.2 SW1.2 SW1.4 SW8.5(A5) SW8.6(A6) U2.15(SDA) U9.6(SDAIN)
SI: SW8.11(B6) U3.5(SI)
SWDCK: J2.3(N3) SW6.6(B3)
SWDIO: J2.2(N2) SW6.8(B1)
UP_RX: R59.2 SW6.7(B2)
UP_TX: SW6.5(B4) U6.12(RXD_ECI)
USB_DN: D5.2 J7.2(DM) U6.4(D_N)
USB_DP: D6.2 J7.3(DP) U6.3(D_P)
VCOIN: C1.1 SW4.3(NC) SW5.1(NO) ZB1.P2
VREG: C22.1 C24.1 L2.2 RFB1.1 SW5.3(NC)
WP: J10.16 R8.2 R9.2 U1.7(WP)
N17010314: C19.1 U2.10(XTALO) Y1.3
N17010533: C14.1 R24.1 RD7.C
N17010535: C15.1 R24.2 U2.6(RF)
N17396120: C18.1 U2.9(XTALI) Y1.1
N17594109: C8.1 RD6.B U2.2(LDOIN)
N17687697: C17.1 R25.2 RD7.A
N17807795: LS1.2 Q1.C R11.2
N17819688: C20.1 R26.2 R28.1 Y2.1
N17819692: C21.1 R27.1 R28.2 Y2.2
N17856759: C2.1 R3.2 U2.28(VDDO)
N17856781: C3.1 R4.2 U2.14(VDDM)
N17856809: C4.1 R5.2 U2.11(VDDC)
N17857031: R7.2 SW2.2 SW2.4
N17857033: R23.1 U2.17(TMC)
N17866760: R1.2 R2.1 SW3.2 SW3.4
N17873060: FB1.2 FB2.1 RD5.C
N17920960: C22.2 RFB1.2 RFB2.1 U5.3(FB)
N17920962: L2.1 U5.1(LX)
N17955658: J1.S(RF_IN) RD7.B
N18004658: C28.1 C29.2 D4.2 FB3.2 J7.1(VBUS)
N18008391: R6.1 SW3.1 SW3.3
N18014200: J12.1 R29.1 SW5.2(COM)
N18031338: R16.2 U3.3(WP_L/ACC)
N18031342: R15.2 U3.7(HOLD_L)
N18033890: R42.1 U9.5(READY)
N18033892: R39.2 R40.2 R41.2 R42.2 U9.8(VCC)
N18034018: R50.2 U8.2(SCL)
N18034022: R51.2 U8.4(SDA)
N18034212: R52.2 U14.7(RST)
N18058355: R60.1 U6.14(GPIO1_ECI_L/DSR_ECI)
N18058357: D3.C1(RED_CATHODE) R61.2
N18058361: D3.C2(GREEN_CATHODE) R60.2
N18058400: C25.2 C26.2 U6.5(VIO) U6.6(VDD)
N18058453: R59.1 U6.13(TXD_ECI)
N18058566: R61.1 U6.15(GPIO0_ECI_L/DTR_ECI)
N18059557: C32.2 U7.21(CAP)
N178073830: Q1.B R14.1
N178074131: D1.A(ANODE) R22.2
N180008151: L1.1 U4.1(LX)
N180336540: R46.2 U10.5(SDO)
N180336542: R43.2 U10.6(CS)
N180336547: R45.2 U10.4(SDA/SDI/SDO)
N180336548: R44.2 U10.2(SCL/SPC)
N180336549: TP10.1(TP) U10.7(INT_DRDY)
N180341120: R47.1 U13.4(SCL)
N180341121: R48.1 U13.3(SDA)
N180346922: TP15.1(TP) U11.9(INT2)
N180346926: R54.1 U11.8(CS)
N180346928: R53.1 U11.7(SEL/SDO)
N180346929: TP14.1(TP) U11.11(INT1/DRDY)
N180350202: TP19.1(TP) U12.9(INT2)
N180350206: R58.1 U12.8(CS)
N180350208: R57.1 U12.7(SDO/SA0)
N180350209: TP18.1(TP) U12.11(INT1)
N180594720: TP8.1(TP) U7.9(DRDY_M)
N180594780: TP9.1(TP) U7.13(DEN_A/G)
N180595090: R35.1 U7.2(SCL/SPC)
N180595170: R34.1 U7.4(SDA/SDI/SDO)
N180595484: R30.2 U7.8(CS_M)
N180595486: TP20.1(TP) U7.11(INT1_A/G)
N1805954815: R31.2 U7.7(CS_A/G)
N1805954817: TP21.1(TP) U7.12(INT2_A/G)
N1805954819: R33.1 U7.5(SDO_A/G)
N1805954820: R32.1 U7.6(SDO_M)
N1805954822: TP22.1(TP) U7.10(INT_M)

Pads without a net: J7 4; J10 17 18; J11 3 4 5 6 7 8 9 10 11 12 13 14 15 16; J13 1 2 3 4 5 6 7 8 9 10 11 12 13 14 15 16 17 18; U4 5; U6 1 9 10 11 16 17 18 19 22 23 24; U7 24; U8 3 6; U11 2 3; U12 2 3; U14 3 4 5; ZB1 P1

## Via types
v1: diameter 0.5, hole 0.25, TOP to BOTTOM, 514 vias

## Routing (per net, layer and track width the routed paths; a pad name or vN(x,y) marks a point on that pad's centre or on a via; arc(x,y) is an arc through that point)
5V_USB: length 6.1
  TOP w0.3: U6.7 55.12,11.45 55.35,11.23 v1(55.98,11.23) ; U6.8 v1(55.98,12.22)
  TOP w0.4: FB3.1 v1(48.6,7.73) ; D7.1 v1(55.98,11.23) ; C54.2 v1(55.98,12.22)
  TOP w0.5: D7.1 C54.2
  BOTTOM w0.4: SW4.1 v1(45.2,4.7)
GND: length 274.3
  TOP w0.2: 53.62,1.45 J7.SH6 ; J7.SH6 55.98,1.45 ; J7.SH6 54.8,2.63 ; 51.22,1.45 J7.SH5 ; J7.SH5 52.4,2.63 ; J7.SH5 53.58,1.45 ; 55.02,32.08 U14.H ; U14.H 55.35,32.91 ; U14.H 55.68,32.08 ; U14.H 55.35,31.24 ; J7.SH3 50.17,2.33 ; J7.SH3 49.22,1.45 ; J7.SH3 51.13,1.45 ; 56.07,1.45 J7.SH4 ; J7.SH4 57.98,1.45 ; J7.SH4 57.02,2.33
  TOP w0.25: 42.91,27.95 42.91,27.5 ; 42.91,27.95 42.33,27.95 ; 42.91,27.95 42.91,28.44 v1(43.12,28.66) ; 42.91,27.5 42.89,27.52 U7.16 ; 42.91,27.5 42.91,27.1 ; 42.91,27.1 42.89,27.09 42.33,27.09 ; 42.91,27.1 42.91,26.66 U7.14 ; 42.35,28.52 42.35,29.03 v1(42.48,29.15) ; 41.92,28.52 41.92,28.95 v1(41.73,29.15) 41.49,28.92 41.49,28.52 ; U14.1 v1(54.2,33.33) ; U12.16 v1(45.2,19.7)
  TOP w0.3: U6.2 52.38,11.82 v1(51.98,11.82) ; 44.47,21.43 44.85,21.43 44.85,21.82 v1(45.08,22) 45.35,21.81 45.35,21.43 ; U11.10 v1(46.35,15.32) ; U11.12 45.35,15.11 v1(45.08,15.3) 44.85,15.12 U11.13 44.47,14.72 ; U11.16 v1(45.2,13) ; 46.35,21.43 v1(46.35,22) ; C49.1 v1(45.7,17.18) ; U12.5 47.12,18.7 v1(47.12,18.27) ; U11.5 47.23,11.9 v1(47.4,11.9)
  TOP w0.31: A1.1 A1.2 C16.1 R25.1
  TOP w0.35: 39.75,21.27 v1(39.75,20.38) ; v1(40.8,21.77) 40.67,21.77 40.35,21.45 40.35,21.27 ; U10.3 39.15,19.35 38.75,19.35 v1(38.58,19.18)
  TOP w0.381: 43.96,19.6 C48.1 42.99,19.6 ; 18.88,32.26 J9.4 ; J9.4 20.36,32.26 ; J9.4 20.36,33.74 ; J9.4 18.88,33.74 ; J7.SH2 57.83,3.9 ; J7.SH2 56.8,2.97 ; J7.SH2 56.8,4.83 ; J7.SH2 55.77,3.9 ; J8.4 69.83,31.64 ; J8.4 68.34,31.64 ; J8.4 68.34,33.13 ; J8.4 69.83,33.13 ; 25.38,23.69 U1.4 ; 38.14,23.9 R32.2 ; Y1.2 17.63,4.25 ; Y1.2 15.77,4.25 ; Y1.2 16.7,3.42 ; 55.39,8.62 C25.1 56.36,8.62 ; 31.17,34.1 SW1.3 ; SW1.3 31.85,33.37 ; SW1.3 32.53,34.1 ; C21.2 19.58,19.62 ; 13.57,5.95 Y1.4 14.5,6.78 ; 16.68,25.82 U9.4 ; 12.52,5.52 13,5.52 ; 35.27,34.1 SW1.1 ; SW1.1 36.63,34.1 ; SW1.1 35.95,33.37 ; 51.82,7.07 D4.1 52.78,7.07 ; 51.43,3.9 J7.SH1 50.4,2.97 ; C19.2 18.68,4.73 ; 39.75,21.27 39.75,21.76 ; 53.67,8.12 D5.1 ; D5.1 53.19,8.62 ; D5.1 54.16,8.62 ; 13.37,19.57 C20.2 14.33,19.57 ; C36.2 37.98,21.5 ; 29.86,26.18 30.34,26.18 ; 30.34,26.18 30.83,26.18 ; 30.34,26.18 30.34,25.09 ; 10.47,25.41 10.47,24.73 11.08,24.73 ; 50.42,26.81 50.42,25.84 ; 51.89,28.52 C34.2 52.86,28.52 ; C1.2 24.75,28.58 ; C1.2 24.14,27.9 ; C1.2 25.36,27.9 ; 40,21.97 C35.2 40.51,22.45 ; 54.29,8.62 C26.1 55.26,8.62 ; 8.65,12.54 C17.2 8.65,13.51 ; 26.02,23.69 26.02,24.77 ; 8.65,16.07 C16.2 8.65,17.03 ; 54.9,3.22 J7.5 ; J7.5 55.33,4.12 ; J7.5 54.9,5.03 ; 68.34,8.24 J11.18 ; J11.18 68.34,6.75 ; J11.18 69.83,8.24 ; J11.18 69.83,6.75 ; Q1.E 22.5,21.53 ; Q1.E 23.23,20.8 ; Q1.E 21.77,20.8 ; C7.2 10.83,23.02 ; C7.2 10.1,22.09 ; C7.2 9.36,23.02 ; C57.1 37.2,29.06 ; J11.17 67.29,6.75 ; J11.17 67.29,8.24 ; J11.17 65.8,8.24 ; J11.17 65.8,6.75 ; 27.32,25.86 27.32,24.77 27.76,24.77 ; D6.1 53.06,8.62 ; 49.77,28.11 U8.5 49.77,27.24 ; 68.47,2.05 69.22,2.79 ; 69.22,2.79 69.96,3.54 ; 69.22,2.79 69.96,2.05 ; 69.22,2.79 68.47,3.54 ; 51.68,7.07 C29.1 50.72,7.07 ; 49.22,7.68 C28.2 ; C28.2 49.9,7.07 ; C28.2 50.58,7.68 ; 52.24,32.9 C38.2 ; 14.22,8.64 14.22,9.12 ; 12.04,10.18 C15.2 13.01,10.18 ; 8.64,10.18 C14.2 9.61,10.18 ; R10.2 30.07,34.58 ; R10.2 30.07,33.62 ; R10.2 30.58,34.1 ; 14.22,13.75 14.22,14.23 ; 41.55,18.73 R46.1 41.55,17.77 ; 18.24,6.98 18.73,6.98 ; 57.48,12.22 57.48,12.71 ; 42.99,13.15 C44.1 ; 50.97,33.17 51.98,33.17 ; J1.G1 9.7,6.64 ; R57.2 48.71,18.9 ; 46.08,34.66 46.08,34.17 46.58,34.17 ; 57.48,10.74 57.48,11.23 ; 37.2,25.24 R33.2
  TOP w0.4: C34.2 v1(52.38,29.18) ; SW1.1 35.65,34.4 35.1,34.4 v1(35.05,34.45) ; D6.1 v1(51.95,8.62) ; 57.48,11.23 v1(58.12,11.23) ; 14.22,10.02 v1(13.57,10.02) ; 51.48,33.17 v1(51.48,33.9) ; C48.1 v1(43.48,18.95) ; 26.02,24.77 26.02,26.02 25.38,26.02 U1.4 24.68,24.77 v1(24.35,25.1) ; C15.2 v1(12.53,9.52) ; 14.22,9.12 v1(13.57,9.12) ; v1(42.25,30.7) C32.1 C55.2 C56.2 v1(38.55,30.7) ; C1.2 v1(24.75,26.98) ; C17.2 v1(9.3,13.03) ; v1(49.23,3.9) J7.SH1 v1(50.4,4.98) ; D5.1 53.73,8.57 53.73,8.23 v1(54,7.95) ; v1(26.95,26.12) 26.68,25.85 U1.2 ; v1(6.48,5.4) J1.G2 v1(6.48,7.88) ; v1(27,23.43) 27.32,23.75 27.32,24.77 ; v1(40.65,22.5) 40.05,22.5 C35.2 ; 13,5.52 v1(13,6.18) ; R12.2 v1(20.82,4.12) ; C19.2 v1(18.2,4.07) ; C28.2 v1(49.9,8.43) ; v1(9.12,7.88) J1.G1 v1(9.12,5.4) ; C25.1 v1(55.88,7.98) ; R33.2 v1(36.55,25.73) ; C38.2 v1(52.73,33.55) ; C36.2 v1(37.5,22.15) ; C57.1 v1(36.55,28.57) ; U8.5 v1(49.17,27.68) ; U9.4 v1(17.9,26.27) ; R46.1 v1(42.2,18.25) ; C2.2 v1(19.7,17.23) ; 20.82,6.98 v1(20.82,6.32) ; 14.22,13.75 v1(13.57,13.75) ; R32.2 v1(38.62,23.25) ; C21.2 v1(19.1,20.27) ; 10.47,24.73 v1(9.72,24.73) ; 50.42,26.32 v1(49.77,26.32) ; C16.2 v1(9.3,16.55) ; C14.2 v1(9.12,9.52) ; C43.1 46.25,11.12 v1(46.55,10.82) ; C5.2 v1(28.7,20) ; C44.1 v1(43.48,12.5) ; C26.1 v1(54.77,7.98) ; R57.2 v1(48.23,18.25) ; Q1.E v1(22.5,19.93) ; C20.2 v1(13.85,20.23) ; R23.2 v1(24.82,10.02) ; 14.22,11.9 v1(13.57,11.9) ; R53.2 v1(48.23,11.55) ; 57.48,12.22 v1(58.12,12.22) ; 14.22,12.8 v1(13.57,12.8) ; C29.1 v1(51.2,7.73) ; D4.1 v1(52.3,7.73)
  TOP w0.45: 18.73,6.98 v1(18.73,6.32)
  TOP w0.5: 30.34,26.18 v1(30.34,29.18)
  L02_GND w0.381: 65.8,6.75 J11.17 ; J11.17 65.8,8.24 ; J11.17 67.29,6.75 ; J11.17 67.29,8.24 ; J8.4 69.83,33.13 ; J8.4 68.34,31.64 ; J8.4 69.83,31.64 ; J8.4 68.34,33.13 ; 68.47,3.54 69.22,2.79 ; 69.22,2.79 68.47,2.05 ; 69.22,2.79 69.96,3.54 ; 69.22,2.79 69.96,2.05 ; J11.18 69.83,6.75 ; J11.18 68.34,8.24 ; J11.18 69.83,8.24 ; J11.18 68.34,6.75 ; 18.88,32.26 J9.4 ; J9.4 20.36,32.26 ; J9.4 18.88,33.74 ; J9.4 20.36,33.74
  BOTTOM w0.2: v1(55.35,33.1) v1(55.35,31.05)
  BOTTOM w0.25: v1(10.4,26.25) 11.15,25.5 U4.2 U4.H ; U5.2 U5.H ; U5.H U5.5 ; U5.H v1(41.34,7.52)
  BOTTOM w0.35: v1(12.6,21.7) U4.H v1(10.02,21.7)
  BOTTOM w0.381: 9.95,19.02 9.95,19.96 ; 9.95,19.02 9.21,19.02 ; 9.95,19.02 10.68,19.02 ; 68.34,6.75 J11.18 ; J11.18 69.83,8.24 ; J11.18 69.83,6.75 ; J11.18 68.34,8.24 ; 28.97,0.73 SW5.SH4 30.43,0.73 ; 42.94,5.32 C23.2 43.55,4.64 ; J8.4 69.83,33.13 ; J8.4 69.83,31.64 ; J8.4 68.34,33.13 ; J8.4 68.34,31.64 ; 46.6,2.29 SW4.SH1 46.6,3.56 ; 36.27,0.73 SW5.SH3 37.73,0.73 ; U5.H 43.83,7.52 ; 18.88,32.26 J9.4 ; J9.4 20.36,32.26 ; J9.4 20.36,33.74 ; J9.4 18.88,33.74 ; 69.22,2.79 69.96,2.05 ; 69.22,2.79 69.96,3.54 ; 69.22,2.79 68.47,2.05 ; 69.22,2.79 68.47,3.54 ; 40.03,0.73 SW4.SH4 38.57,0.73 ; 29.7,2.29 SW5.SH2 29.7,3.56 ; 47.33,0.73 SW4.SH3 45.87,0.73 ; 39.3,2.29 SW4.SH2 38.57,2.93 ; 10.35,16.69 C30.2 10.96,17.38 ; 67.29,8.24 J11.17 67.29,6.75 ; 13.77,13.1 C8.2 14.28,12.62 ; 37,2.29 SW5.SH1 37.73,2.93 ; 43.94,7.65 RFB2.2 44.91,7.65
  BOTTOM w0.4: SW5.SH1 v1(37,3.7) ; SW5.SH4 29.7,0.93 v1(28.82,0.93) ; C23.2 v1(44.3,5.32) ; SW5.SH3 37,0.93 v1(36.12,0.93) ; C24.2 v1(38.95,8.6) ; SW4.SH2 v1(39.3,3.7) ; SW5.SH2 v1(28.82,2.93) ; C30.2 v1(9.6,17.38) ; v1(40.17,0.93) 39.3,0.93 SW4.SH4 ; SW4.SH1 v1(47.48,2.93) ; SW4.SH3 46.6,0.93 v1(47.48,0.93) ; RFB2.2 v1(44.42,7)
  BOTTOM w0.5: 43.98,26.04 43.98,26.03 44.92,26.03 v1(44.92,28.66) ; 43.98,26.04 v1(43.98,28.66) ; 43.98,26.04 v1(43.98,23.41) ; 43.98,26.04 ZB1.N ; v1(41.73,23.41) 41.73,26.04 ZB1.N ; ZB1.N v1(42.94,23.41) ; ZB1.N 43.12,26.22 v1(43.12,28.66)
  vias: v1(6.35,3.85) v1(6.35,2.35) v1(6.35,0.85) v1(6.5,32.25) v1(6.5,31.3) v1(6.5,30.3) v1(6.5,29.3) v1(6.5,26.7) v1(6.5,25.7) v1(6.5,24.7) v1(6.5,23.7) v1(6.5,22.7) v1(6.5,21.7) v1(6.5,20.7) v1(6.5,19.7) v1(6.5,18.7) v1(6.5,17.7) v1(6.5,14.95) v1(6.5,13.85) v1(6.5,12.85) v1(6.5,11.85) v1(6.5,10.85) v1(6.5,9.85) v1(6.5,8.85) v1(7.3,30.2) v1(7.45,25.65) v1(7.6,31.75) v1(7.6,17.7) v1(7.95,23.7) v1(7.9,21.7) v1(7.95,19.7) v1(7.9,5.15) v1(7.9,3.85) v1(7.9,2.35) v1(7.9,0.85) v1(8.2,30.55) v1(8.55,25.45) v1(8.6,17.7) v1(8.8,15.2) v1(8.8,14.15) v1(8.9,32.25) v1(9,19) v1(8.95,12.05) v1(8.95,8.7) v1(9.15,34.5) v1(9.15,23) v1(9.3,30.55) v1(9.45,33.35) v1(9.4,3.85) v1(9.4,2.35) v1(9.55,25.7) v1(9.65,20.35) v1(10.1,30.1) v1(10.1,12.05) v1(10.15,10.05) v1(10.1,8.7) v1(10.15,7.45) v1(10.25,5.9) v1(10.55,13.5) v1(10.6,15.05) v1(10.75,29.35) v1(10.9,3.85) v1(10.9,2.35) v1(11.05,28.4) v1(11,27.2) v1(11.15,34.45) v1(11.1,12.05) v1(11.4,16.35) v1(11.55,10.05) v1(11.55,8.7) v1(11.45,6.9) v1(11.45,5.35) v1(12.1,15.05) v1(12.1,13.55) v1(12.1,12.05) v1(12.4,2.35) v1(12.5,31.45) v1(12.45,29.65) v1(12.5,27.5) v1(12.55,7.4) v1(12.62,26.07) v1(12.7,17.43) v1(12.9,19.75) v1(12.93,14.95) v1(12.93,3.62) v1(13.15,34.45) v1(13.22,25.02) v1(13.25,23.82) v1(13.28,22.62) v1(13.25,8.4) v1(13.9,2.35) v1(14.05,21.75) v1(14.05,7.05) v1(14.1,27.45) v1(14.3,29.65) v1(14.55,31.45) v1(14.9,8.15) v1(14.9,7.02) v1(15,20.3) v1(15.15,34.45) v1(15.4,2.35) v1(15.7,30.55) v1(15.75,21.7) v1(16.12,3.18) v1(16.3,25.05) v1(16.65,9.05) v1(16.9,31.5) v1(16.9,7.12) v1(17.05,2.35) v1(17.15,34.45) v1(17.35,3.18) v1(17.6,13.4) v1(17.6,11.77) v1(17.6,10.15) v1(17.85,21.65) v1(17.8,20.3) v1(18.1,23.85) v1(18.25,30.65) v1(19.05,2.35) v1(19.15,34.45) v1(19.23,13.4) v1(19.23,11.77) v1(19.23,10.15) v1(19.2,3.52) v1(19.32,5.38) v1(20.3,31.3) v1(20.85,13.4) v1(20.85,11.77) v1(20.85,10.15) v1(21.05,2.35) v1(21.15,34.45) v1(21.9,31.45) v1(22.7,24.3) v1(22.85,3.6) v1(22.95,30.25) v1(23.05,2.35) v1(23.25,0.9) v1(23.5,22.4) v1(23.55,19.45) v1(23.65,6.45) v1(24.4,23.5) v1(24.7,6.5) v1(25,29.1) v1(25.25,0.9) v1(25.95,33.3) v1(26.05,31.75) v1(26.05,21.65) v1(27.25,0.9) v1(27.65,4.5) v1(28.3,21.6) v1(28.75,9.25) v1(29.45,31.7) v1(29.9,21.2) v1(30.8,34.45) v1(30.85,17.4) v1(30.9,9.35) v1(30.95,0.9) v1(32.3,21.25) v1(32.45,11.95) v1(32.75,34.45) v1(32.7,0.9) v1(32.9,9.35) v1(33.9,34.45) v1(33.9,33.25) v1(33.85,31.65) v1(34.1,0.9) v1(34.45,3.45) v1(34.6,24.15) v1(34.6,21.45) v1(34.95,12.05) v1(35.35,16.65) v1(35.5,29.8) v1(36.85,34.45) v1(37.05,12) v1(37.95,32.1) v1(37.85,4.5) v1(38.2,29.5) v1(38.85,15.9) v1(41.25,19.15) v1(41.9,33.3) v1(42.2,0.95) v1(43.55,22.1) v1(43.7,0.95) v1(44.6,30.45) v1(45.65,24) v1(45.8,20.7) v1(46.65,4.3) v1(46.8,34.45) v1(46.9,5.8) v1(47.2,29.4) v1(47.85,34.45) v1(48.25,0.95) v1(48.6,25.8) v1(48.85,23.1) v1(49,0.95) v1(50.24,2.65) v1(51,9.65) v1(51.98,14.12) v1(51.98,12.97) v1(52.4,2.95) v1(52.65,19.4) v1(53.12,14.12) v1(53.12,12.97) v1(53.12,11.82) v1(53.65,34.45) v1(54,20.75) v1(54.27,14.12) v1(54.27,12.97) v1(54.27,11.82) v1(54.9,5.8) v1(54.85,2.9) v1(55.2,18.65) v1(55.65,34.45) v1(56.4,5.1) v1(56.45,16.95) v1(56.94,2.63) v1(57.65,34.45) v1(58.05,7.3) v1(58.05,3.9) v1(58.15,13.2) v1(58.2,0.95) v1(58.6,19.25) v1(59.1,27.1) v1(59.35,14.1) v1(59.35,0.95) v1(59.45,31.9) v1(59.65,34.45) v1(61.35,0.95) v1(61.65,34.45) v1(63.35,0.95) v1(63.65,34.45) v1(65.35,0.95) v1(65.55,29.9) v1(65.65,34.45) v1(67.15,5.4) v1(67.35,0.95) v1(67.65,34.45) v1(69.05,29.85) v1(69.35,0.95) v1(69.65,34.45) v1(70,5.4) v1(70.6,23.9) v1(70.75,21.45) v1(70.75,18.8) v1(70.7,16.3) v1(70.7,13.85) v1(70.7,11.2) v1(70.75,8.7) v1(70.8,26.45) v1(71.4,32.05) v1(71.35,0.95) v1(71.65,34.45) v1(72.2,5.45) v1(72.25,29.95) v1(73.1,2.25) v1(73.2,33.05) v1(73.35,0.95) v1(73.45,34.45) v1(73.75,3.5) v1(73.9,31.95) v1(74.6,5.5) v1(75.05,31.7) v1(75,3.85) v1(76.3,32.2) v1(76.3,30.2) v1(76.3,28.2) v1(76.3,26.2) v1(76.3,24.2) v1(76.3,22.2) v1(76.3,20.2) v1(76.3,18.2) v1(76.3,16.2) v1(76.3,14.2) v1(76.3,12.2) v1(76.3,10.2) v1(76.3,8.2) v1(76.3,6.2) v1(76.3,4.75) v1(76.3,3.2)
VDD_SENS: length 26.2
  TOP w0.25: 40.63,28.52 40.63,28.96 v1(40.4,29.2) 40.2,29 40.2,28.52 ; U7.3 v1(39.95,27.52) ; v1(38.7,28.57) 38.75,28.52 39.34,28.52 39.34,29.18 v1(39.33,29.2) ; 55.08,29.2 v1(54.42,29.2)
  TOP w0.3: 44.08,20.45 44.08,20.27 44.15,20.2 U12.15 ; 44.08,20.45 C48.2 ; 44.08,20.45 44.08,20.7 U12.14 ; U11.1 C43.2 ; U11.15 44.2,13.5 44.08,13.62 44.08,14 ; U11.14 44.08,14 ; 44.08,14 C44.2 ; U12.1 C49.2
  TOP w0.35: U10.1 v1(38.12,20.65) ; 39.15,21.27 C35.1
  TOP w0.4: v1(52.73,31.4) C38.1 52.15,32.05 52.08,31.98 51.48,31.98 ; v1(52.38,27.02) C34.1 51.27,27.68 ; C44.2 v1(43.48,14.65) ; R54.2 v1(48.23,15.45) ; C57.2 v1(38.7,28.57) ; R43.1 v1(41.85,21.55) ; C36.1 v1(38.12,20.65) ; R58.2 v1(48.23,22.15) ; v1(45.17,10.38) 44.85,10.7 C43.2 ; C55.1 v1(40.4,29.2) ; C37.1 v1(51.27,25.65) ; C48.2 v1(43.48,21.1) ; R30.1 v1(40.48,23.25) ; R31.1 v1(39.52,23.25) ; C49.2 v1(44.2,17.82) ; C56.1 v1(39.33,29.2) ; C35.1 v1(38.5,22.45)
VDDIO: length 53.4
  TOP w0.25: U14.8 v1(56.5,33.33)
  TOP w0.4: R18.1 v1(24.82,9.12) ; D3.A1 v1(50.42,16.6) ; 21.73,6.98 22.62,6.98 v1(22.62,6.32) ; R13.1 v1(18.23,17.23) ; 46.08,33.27 v1(46.73,33.27) ; R11.1 v1(19.25,21.5) ; R39.1 v1(19.8,29.65) ; R3.1 v1(20.6,17.23) ; R52.1 v1(57.6,30.82) ; R22.1 v1(23.8,16.05) ; SW8.1 v1(28.75,6.27) ; Q3.3 56.35,29.43 ; D3.A2 v1(50.42,17.6) ; SW8.2 v1(30.02,6.27) ; R7.1 v1(30.73,32.5)
  TOP w0.5: J12.2 26.15,4.57 R29.2 ; v1(56.35,29.12) v1(56.35,29.75)
  L03_PWR w0.381: 68.34,27.07 69.09,27.81 ; 69.09,27.81 68.34,28.56 ; 69.09,27.81 69.83,27.07 ; 69.09,27.81 69.83,28.56 ; J12.2 27.11,5.53 ; J12.2 27.11,4.12 ; J12.2 25.69,5.53 ; J12.2 25.69,4.12 ; 60.72,31.64 J8.1 ; J8.1 62.21,31.64 ; J8.1 60.72,33.13 ; J8.1 62.21,33.13 ; 11.26,32.26 J9.1 ; J9.1 12.74,33.74 ; J9.1 12.74,32.26 ; J9.1 11.26,33.74 ; J2.1 62.34,3.54 ; J2.1 60.85,3.54 ; J2.1 60.85,2.05 ; J2.1 62.34,2.05 ; J11.1 67.29,28.56 ; J11.1 65.8,27.07 ; J11.1 67.29,27.07 ; J11.1 65.8,28.56
  BOTTOM w0.4: LS1.1 14.48,25.38 v1(15.46,25.38) ; LS1.1 14.48,23.57 ; LS1.1 v1(15.46,24.52) ; 14.48,23.57 14.53,23.62 v1(15.46,23.62) ; 14.48,23.57 14.48,22.77 v1(15.46,22.77)
  BOTTOM w0.5: RD6.C 13.22,16.88 14.15,17.8 17.65,17.8 v1(18.23,17.23)
VDDIO_EE: length 7.6
  TOP w0.35: 27.32,19.07 27.32,18.5 C5.1
  TOP w0.4: R8.1 28.7,16.6
  TOP w0.5: SW8.16 28.7,14.91 C5.1
VDDIO_SF: length 15.1
  TOP w0.4: R15.1 35.15,19.07 U3.8 v1(34.16,17.85)
  TOP w0.5: v1(30.02,16.05) SW8.15 ; R16.1 36.5,21.95 ; 36.5,21.95 36.5,23.48 R17.1 ; 36.5,21.95 36.5,19.95 36.3,19.75 R15.1
  BOTTOM w0.5: v1(34.16,17.85) 32.36,16.05 v1(30.02,16.05)
1P2VC: length 1.3
  TOP w0.4: 19.62,6.98 v1(19.62,6.32)
  BOTTOM w0.4: 19.62,6.98 v1(19.62,6.32)
1P2VRF: length 11.8
  TOP w0.25: v1(15.75,10.3) 15.8,10.3 16.02,10.52 16.77,10.52 ; v1(15.75,11.68) 15.82,11.6 16.27,11.6 16.35,11.52 16.77,11.52 ; 16.77,10.02 16.35,10.02 v1(15.75,9.43) ; v1(15.75,12.32) 15.85,12.32 16.15,12.03 16.77,12.03
  TOP w0.4: C10.1 15.3,12.57 15.5,12.57 v1(15.75,12.32) ; v1(15.75,11.68) 15.7,11.73 15.25,11.73 C11.1 ; C12.1 15.12,10.07 15.53,10.07 v1(15.75,10.3) ; C13.1 15.12,9.18 15.5,9.18 v1(15.75,9.43)
  BOTTOM w0.5: 15.75,10.9 v1(15.75,11.68) v1(15.75,12.32) ; 15.75,10.9 v1(15.75,10.3) v1(15.75,9.43) ; 15.75,10.9 FB2.2
BCM_RX: length 74
  TOP w0.15: U2.12 18.98,8.65 v1(19.12,8.5) ; R12.1 v1(21.45,5.62) 25.07,5.62 25.59,6.16 27.64,6.16 28.35,5.45 31.2,5.45 31.4,5.65 43.22,5.65 43.87,6.3 45.37,6.3 49.42,10.36 49.42,16.32 49.15,16.6 49.15,22.07 49.86,22.79 SW6.2 51.59,22.79 51.9,23.1 51.9,23.8 51.65,24.05 SW6.1 50.7,24.8 50.9,25 54.23,25 v1(58.92,29.7)
  BOTTOM w0.15: v1(58.92,29.7) 59.42,29.2 63.36,29.2 J8.3 ; v1(21.45,5.62) 20.68,5.62 20.23,6.07 20.23,8.23 19.95,8.5 v1(19.12,8.5)
BCM_TX: length 72.7
  TOP w0.15: U2.13 19.48,8.88 20.2,8.15 20.2,3.85 20.43,3.62 21.7,3.62 23.33,5.25 25.18,5.25 25.76,5.84 27.41,5.84 28.1,5.15 31.55,5.15 31.73,5.32 43.35,5.32 44,5.98 45.5,5.98 49.73,10.2 49.73,16.6 49.52,16.8 49.52,19.18 49.75,19.4 51.55,19.4 51.8,19.65 51.8,20.1 51.66,20.25 SW6.4 49.88,20.25 49.62,20.5 49.62,21.23 49.91,21.52 SW6.3 51.41,21.52 58.42,28.52 59.25,28.52 v1(60.48,29.75)
  BOTTOM w0.15: J8.2 61.37,29.75 v1(60.48,29.75)
CE: length 13.9
  TOP w0.15: SW8.10 36.38,19.15 37.02,19.8 37.02,24.32 36.35,25 R17.2 34.3,25 34.16,25.14 U3.1
EXT_LDO_IN: length 6.6
  BOTTOM w0.35: 11.7,20.15 10.78,20.15 10.6,20.32 U4.6 ; 11.7,20.15 U4.4 ; 11.7,20.15 11.7,19.03 C6.1
  BOTTOM w0.5: 12.38,16.02 12.38,16.7 C30.1 11.7,19.02 C6.1
LDOEXT: length 13.7
  TOP w0.5: RD5.A 11.86,19.34 C7.1 11.86,24.7 C31.1 v1(11.82,25.8)
  BOTTOM w0.35: U4.3 11.7,24.25 L1.2
  BOTTOM w0.5: L1.2 v1(11.82,25.8)
LDOINT: length 3.4
  TOP w0.2: 16.77,12.53 16.3,12.53 C9.1
  TOP w0.4: C9.1 15.07,14.18 14.68,14.57 14.68,14.82
MISO: length 16.1
  TOP w0.15: SW8.9 v1(37.64,15.97) ; 32.89,26.18 32.89,27.26 v1(33.23,27.6)
  BOTTOM w0.15: v1(37.64,15.97) 33.23,20.39 v1(33.23,27.6)
P0: length 78
  TOP w0.15: R10.1 SW2.1 SW2.3 v1(22.9,34.1) 22.9,31.35 23.7,30.55 36.33,30.55 37.08,31.3 45.2,31.3 v1(46,30.5) ; U2.19 v1(22.98,11.02)
  BOTTOM w0.15: v1(22.98,11.02) 24.48,12.53 24.48,20.15 21.9,22.73 21.9,24.45 24.18,26.73 24.18,30.73 24.57,31.12 24.57,32.42 v1(22.9,34.1) ; v1(46,30.5) 47.1,31.6 48.52,31.6 49.9,30.23 57.38,30.23 59.79,27.81 J10.1
P1: length 50.9
  TOP w0.15: R9.1 v1(25.57,15.9) 27.6,13.88 38.25,13.88 38.7,14.32 v1(38.7,14.72) ; U2.20 v1(22.48,11.52)
  BOTTOM w0.15: v1(22.48,11.52) 22.48,10.75 22.75,10.48 23.18,10.48 25.57,12.88 v1(25.57,15.9) ; v1(38.7,14.72) 40.15,14.72 41.42,16 47.92,16 53.67,21.75 57.85,21.75 59.25,23.15 59.25,23.56 J10.3
P2: length 62.8
  TOP w0.15: J10.5 62.12,23.9 62.12,28.88 60.73,30.27 55.7,30.27 55.08,29.65 ; v1(26.32,10.36) 26.04,10.36 25.28,11.12 24.43,11.12 23.02,12.53 U2.22
  BOTTOM w0.15: v1(26.32,10.36) 25.48,11.21 25.48,11.77 27.88,14.18 40.25,14.18 41.62,15.55 43.95,15.55 44.73,14.78 49.35,14.78 55.27,20.7 59.5,20.7 60.96,22.16 J10.5
P3: length 48.1
  TOP w0.15: U2.21 22.93,12.03 24.12,10.82 25.12,10.82 26.1,9.85 v1(27.15,9.85)
  BOTTOM w0.15: J10.7 55.22,20.19 49.5,14.47 44.52,14.47 43.77,15.22 42.12,15.22 40.73,13.82 28.05,13.82 25.85,11.62 25.85,11.32 26.25,10.93 26.55,10.93 27.15,10.32 v1(27.15,9.85)
P4: length 44.7
  TOP w0.15: v1(42.25,13.32) 41.38,13.32 38.98,10.93 26.15,10.93 25.65,11.43 24.68,11.43 23.07,13.03 U2.23
  BOTTOM w0.15: J10.9 59.55,17.65 56.65,14.75 51.83,14.75 51.2,14.12 51.2,12.8 50.75,12.35 48.98,12.35 47.75,13.57 42.5,13.57 v1(42.25,13.32)
P8/P33: length 68.1
  TOP w0.15: v1(34.45,9.23) 35.17,8.5 36,8.5 36.38,8.12 SW8.7 ; U2.24 v1(22.45,13.53) 23.12,13.53 24.93,11.73 26.2,11.73 v1(26.48,11.45) ; U9.1 v1(17.93,28.23)
  BOTTOM w0.15: v1(22.45,13.53) 22.45,17.96 20.05,20.36 20.05,23.32 17.2,26.18 17.2,27.5 v1(17.93,28.23) ; 60.96,15.11 58.14,15.11 55.4,12.38 55.4,11.67 54.7,10.98 50.5,10.98 49.42,9.9 48.2,9.9 46.12,11.98 43.12,11.98 42.7,12.4 39.42,12.4 35.73,8.7 34.98,8.7 v1(34.45,9.23) 33.27,10.4 27.52,10.4 v1(26.48,11.45)
P11/P27: length 62.1
  TOP w0.15: R26.1 16.15,15.85 v1(16.15,15.3) 16.35,15.1 16.35,14.38 16.77,13.95 16.77,13.53
  BOTTOM w0.15: v1(16.15,15.3) 16.75,15.9 18.37,15.9 20.32,13.95 20.32,9.85 22.25,7.93 36.12,7.93 39.92,11.73 41.67,11.73 42.05,11.35 44.88,11.35 45.73,10.5 45.73,9.82 48.38,7.18 51.08,7.18 53.05,5.2 55.17,5.2 56.83,6.85 56.83,8.44 J10.13
P12/P26: length 59.3
  TOP w0.15: U2.32 16.93,14.22 16.65,14.5 16.65,15.1 v1(16.85,15.3) 16.85,15.85 R27.2
  BOTTOM w0.15: J10.15 58.95,8.02 58.95,6.78 56.7,4.52 52.62,4.52 50.7,6.45 47.87,6.45 43.6,10.73 39.37,10.73 36.27,7.62 22.13,7.62 20.02,9.73 20.02,13.8 18.23,15.6 17.15,15.6 v1(16.85,15.3)
P13/P28: length 58.8
  TOP w0.15: U2.29 18.98,14.8 19.19,15.01 19.19,17.41 19.55,17.77 21,17.77 21.35,17.43 21.35,16.12 21.57,15.9 D1.C 23.15,15.9 25.95,13.1 38.9,13.1 40.67,14.88 v1(40.67,16.7)
  BOTTOM w0.15: v1(40.67,16.7) 40.75,16.62 47.4,16.62 53.45,22.68 57.92,22.68 58.6,23.35 58.6,25.27 60.05,26.73 62.41,26.73 63.5,27.81
P14/P38: length 59.6
  TOP w0.15: v1(40,16.05) 40,14.78 38.65,13.43 26.27,13.43 24.4,15.3 24.4,17.88 23.8,18.48 R14.2 20.23,18.1 19.4,18.1 18.75,17.45 18.75,15.05 18.48,14.78 U2.30
  BOTTOM w0.15: v1(40,16.05) 40.85,16.05 41.12,16.32 47.62,16.32 53.48,22.18 57.85,22.18 58.95,23.27 58.95,24.82 60.48,26.35 62.42,26.35 J10.4
P15: length 75.2
  TOP w0.15: R13.2 17.98,15.47 v1(17.98,15.01) U2.31
  BOTTOM w0.15: J10.6 64.83,21.41 64.83,7.25 63.27,5.7 58.42,5.7 56.88,4.15 52.55,4.15 50.65,6.05 47.77,6.05 43.4,10.43 39.52,10.43 36.42,7.32 22,7.32 19.73,9.6 19.73,13.65 18.36,15.01 v1(17.98,15.01)
P24: length 51.5
  TOP w0.15: U2.27 19.98,14.72 20.45,15.2 23.3,15.2 25.75,12.75 30.02,12.75 v1(30.23,12.55) ; U6.21 v1(50.3,13.22)
  BOTTOM w0.15: v1(30.23,12.55) 31.12,13.45 40.98,13.45 41.7,14.18 48.23,14.18 49.17,13.22 v1(50.3,13.22) 49.73,13.8 49.73,14.18 51.12,15.57 56.25,15.57 59.8,19.12 62.43,19.12 J10.8
P25: length 51.5
  TOP w0.15: U6.20 50.6,13.72 v1(50.27,14.05) ; v1(28.65,11.8) 28.05,12.4 25.57,12.4 23.1,14.88 20.65,14.88 20.48,14.7 U2.26
  BOTTOM w0.15: v1(28.65,11.8) 30.5,11.8 31.8,13.1 41.22,13.1 42,13.88 48.02,13.88 49.17,12.72 50.55,12.72 50.83,13 50.83,13.5 v1(50.27,14.05) 51.35,15.12 56.32,15.12 59.9,18.7 62.45,18.7 J10.10
P32: length 54.3
  TOP w0.15: SW8.8 37.64,8.16 36.58,9.23 35.48,9.23 v1(35.45,9.25) ; v1(27.52,11.57) 27.05,12.05 25.25,12.05 23.07,14.22 U2.25
  BOTTOM w0.15: v1(27.52,11.57) 28.3,10.8 33.9,10.8 v1(35.45,9.25) 35.82,9.25 39.32,12.75 42.48,12.75 42.85,13.12 44.2,13.12 44.98,12.34 46.21,12.34 48.35,10.2 49.18,10.2 50.25,11.27 54.5,11.27 54.95,11.73 54.95,12.47 58.73,16.25 62.36,16.25 63.5,15.11
REG_IN: length 4.4
  BOTTOM w0.25: 42.2,6.05 43.06,6.05 43.2,6.19 U5.4 ; 42.2,6.05 U5.6 ; 42.2,6.05 C23.1
  BOTTOM w0.5: SW4.2 C23.1
RESET_N: length 87.5
  TOP w0.15: U2.18 25,10.52 26.17,9.36 27.46,9.36 28.71,10.61 39.75,10.61 v1(40.4,11.25) ; J10.14 64.72,13.8 64.72,20.55 63.8,21.48 63.3,21.48 62.48,22.3 62.48,29.1 60.65,30.93 v1(58.75,30.93) ; 46.08,32.38 v1(46.08,31.62)
  BOTTOM w0.15: v1(58.75,30.93) 58.33,31.35 57.42,31.35 56.6,30.52 50.12,30.52 48.2,32.45 46.9,32.45 v1(46.08,31.62) ; v1(40.4,11.25) 40.6,11.05 43.73,11.05 47.92,6.85 50.85,6.85 52.88,4.82 55.25,4.82 57.3,6.88 57.3,8.02 60.38,11.1 62.03,11.1 J10.14
SCK: length 4.6
  TOP w0.15: SW8.13 32.56,16.29 31.61,17.23 U3.6
SCL: length 95.2
  TOP w0.15: R44.1 v1(37.5,18.12) ; v1(13.45,25.95) TP5.1 15.03,26.3 R40.1 15.45,27.38 15.65,27.57 U9.2 18.5,27.57 18.62,27.7 18.62,28.52 19.2,29.1 22.93,29.1 24.07,30.25 33.88,30.25 v1(36.5,27.62) 37.2,27.62 ; v1(48.12,31.05) R47.2 49.35,30.75 51.12,30.75 R50.1 52.62,30.02 53.17,30.57 56.83,30.57 57.05,30.8 57.05,31.73 56.95,31.82 U14.6 ; U12.4 v1(46.35,18.35) 48.75,15.95 48.75,11.35 48.48,11.07 47.15,11.07 46.35,11.88 U11.4
  BOTTOM w0.15: v1(48.12,31.05) 48.95,30.23 48.95,29.38 47.55,27.98 47.55,20.11 46.35,18.91 v1(46.35,18.35) 45.85,18.85 44.5,18.85 43.05,17.4 38.23,17.4 v1(37.5,18.12) 35.38,20.25 35.38,26.5 v1(36.5,27.62) ; v1(13.45,25.95) 13.45,31.91 J9.2
SCL_EE: length 10.8
  TOP w0.15: 31.3,14.91 31.3,15.71 29.3,17.7 29.3,20.1 28.85,20.55 26.32,20.55 26.02,20.25 26.02,19.07
SCL_SCK: length 37.9
  TOP w0.15: SW8.4 32.56,6.46 32.4,6.3 31.45,6.3 31.3,6.45 31.3,8.05 31.17,8.18 23.65,8.18 23.32,8.5 R18.2 v1(22.6,9.12) 22.2,8.73 21.07,8.73 20.98,8.82 U2.16 ; U9.3 v1(18.05,26.93)
  BOTTOM w0.15: v1(22.6,9.12) 21.62,10.1 21.62,11.88 23.02,13.28 23.02,17.92 20.43,20.52 20.43,23.72 18.5,25.64 18.5,26.48 v1(18.05,26.93)
SDA: length 96.6
  TOP w0.15: U14.2 53.67,32.33 53.4,32.6 53.4,33.6 52.6,34.4 49.35,34.4 R48.2 47.55,32.6 47.55,30.25 47.77,30.02 v1(48.4,30.02) R51.1 ; v1(23.07,26.9) 23.07,26.25 TP6.1 22.43,26.3 R41.1 21.98,27.38 21.77,27.57 19.12,27.57 19.02,27.68 19.02,28.43 19.4,28.8 23.15,28.8 24.25,29.9 33.25,29.9 v1(36.48,26.68) R34.2 ; R45.1 v1(38.17,18.25) ; v1(48.88,10.73) 49.08,10.93 49.08,16.15 47.73,17.5 47.73,19.43 47.45,19.7 U12.6 v1(46.42,19.7) ; U11.6 v1(46.42,13)
  BOTTOM w0.15: v1(48.4,30.02) 48.4,29.3 47.25,28.15 47.25,20.52 v1(46.42,19.7) 45.88,19.15 44.35,19.15 42.9,17.7 38.73,17.7 v1(38.17,18.25) 35.67,20.75 35.67,25.88 v1(36.48,26.68) ; J9.3 19.66,30.43 21.82,30.43 23.57,28.68 23.57,27.4 v1(23.07,26.9) ; v1(48.88,10.73) 48.88,11.77 47.65,13 v1(46.42,13)
SDA_EE: length 13.2
  TOP w0.15: v1(32.22,17.43) 33.84,15.81 SW8.12 ; U1.5 v1(25.38,20.8)
  BOTTOM w0.15: v1(32.22,17.43) 28.85,20.8 v1(25.38,20.8)
SDA_SI: length 65.8
  TOP w0.15: SW8.6 35.11,8.14 34.9,8.35 33.97,8.35 33.84,8.21 SW8.5 33.84,6.26 33.52,5.95 31.02,5.95 30.82,5.75 28.55,5.75 26.48,7.82 R19.2 v1(22.62,8.48) 22.55,8.4 20.98,8.4 20.48,8.9 U2.15 ; v1(23.73,31.35) 24.18,30.9 30.25,30.9 SW1.4 SW1.2 ; 20.77,26.93 v1(19.32,26.93)
  BOTTOM w0.15: v1(22.62,8.48) 23.15,9 23.15,9.48 21.93,10.7 21.93,11.75 23.32,13.15 23.32,18.07 20.75,20.65 20.75,23.85 18.82,25.77 18.82,26.43 v1(19.32,26.93) 19.9,26.35 23.3,26.35 23.88,26.93 23.88,31.2 v1(23.73,31.35)
